# Altium PCB ECG_BLE.PcbDoc (part 1 of 3)
Units mm, origin at the board's own origin, x right, y up, seen from the top; angles counter-clockwise.
Board outline 50.01 x 55.29 mm, 4 copper layers (Top Layer, Internal Plane-GND, Internal Plane-PWR, Bottom Layer), stack 0.99 mm thick; 109 components, 65 nets, 326 pads, 171 vias.
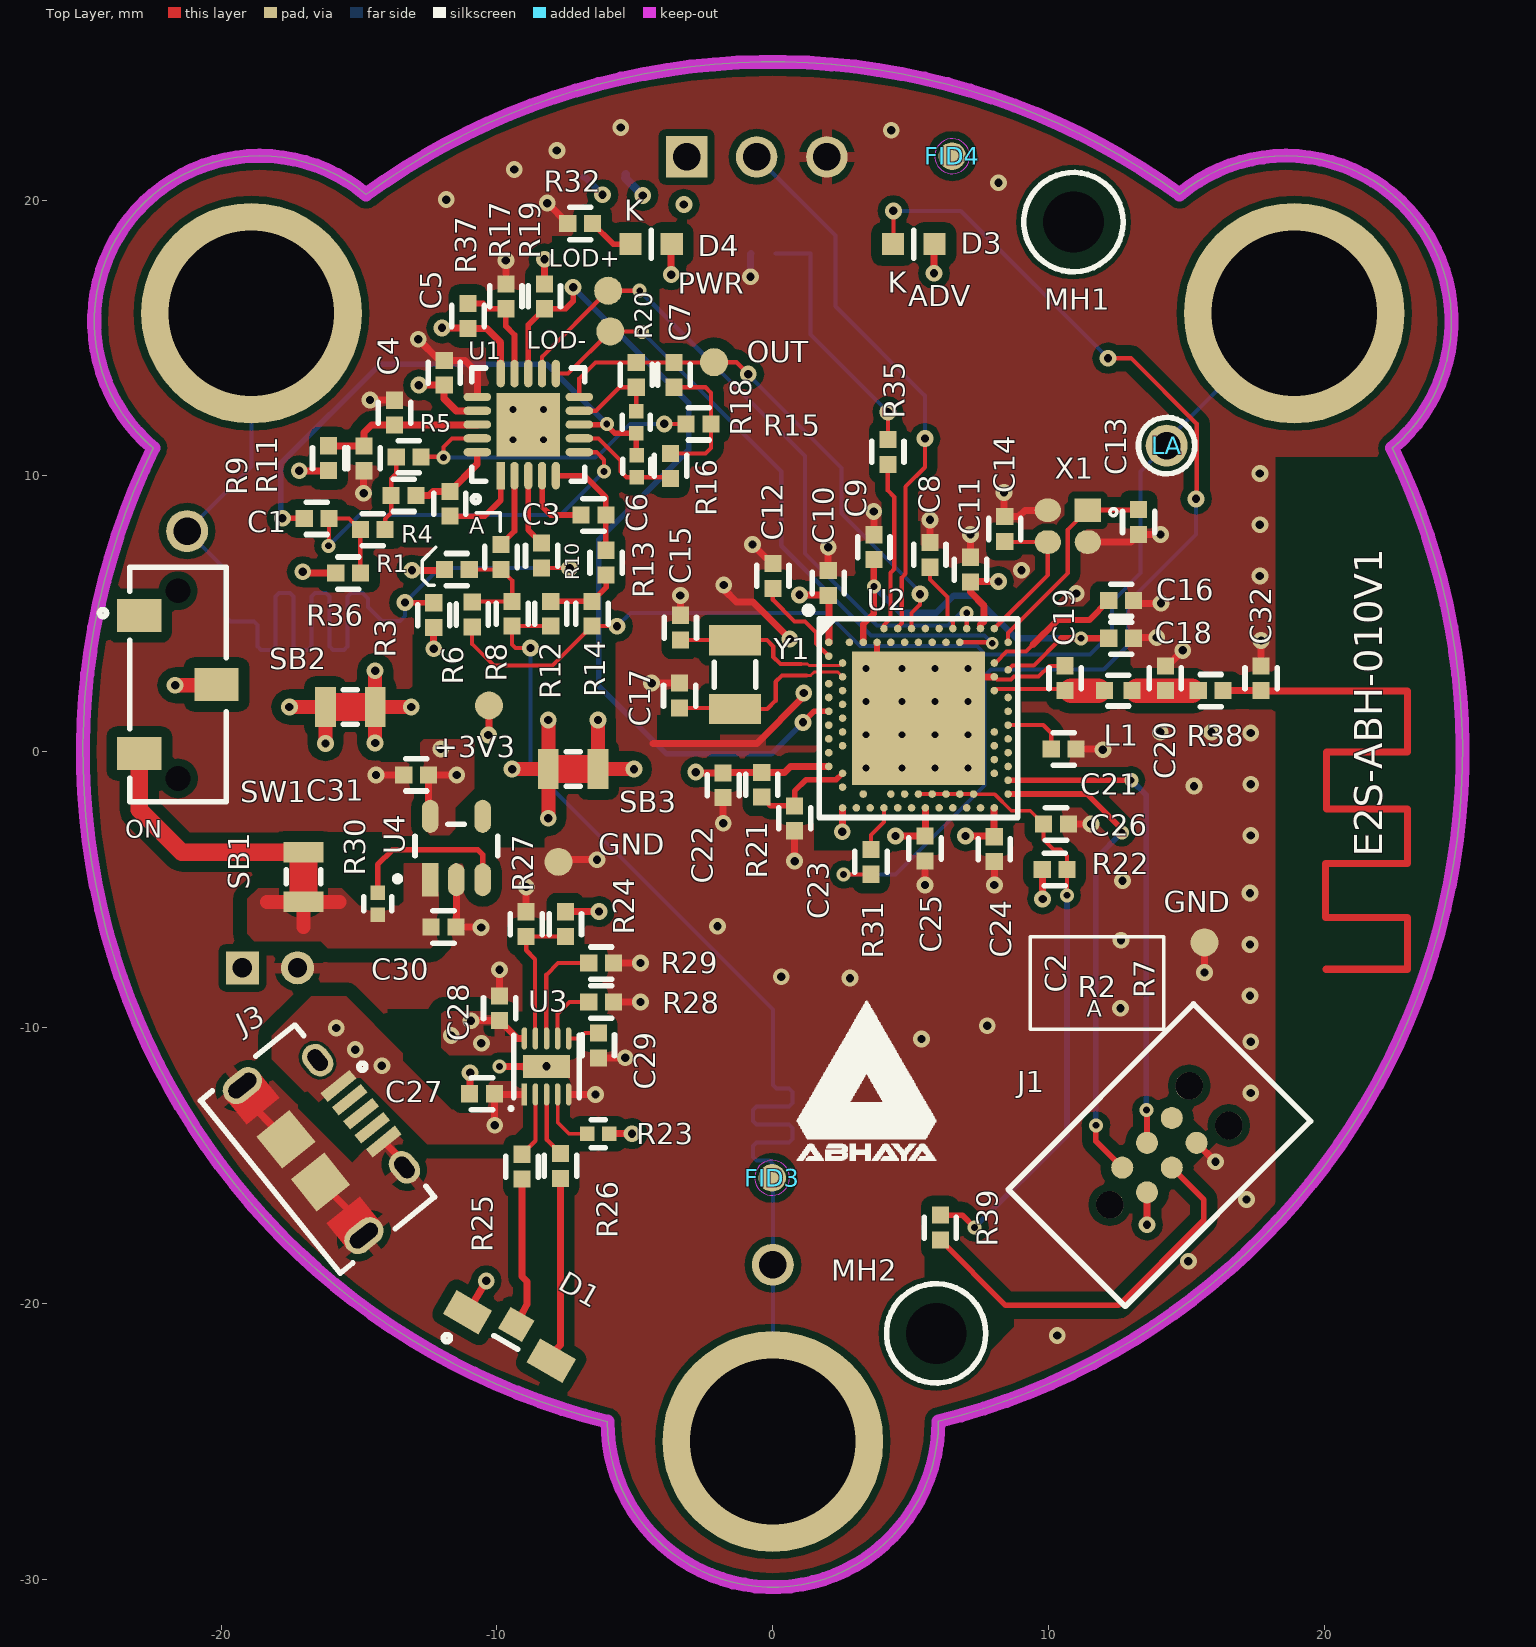
[diagram p0: Top Layer view]
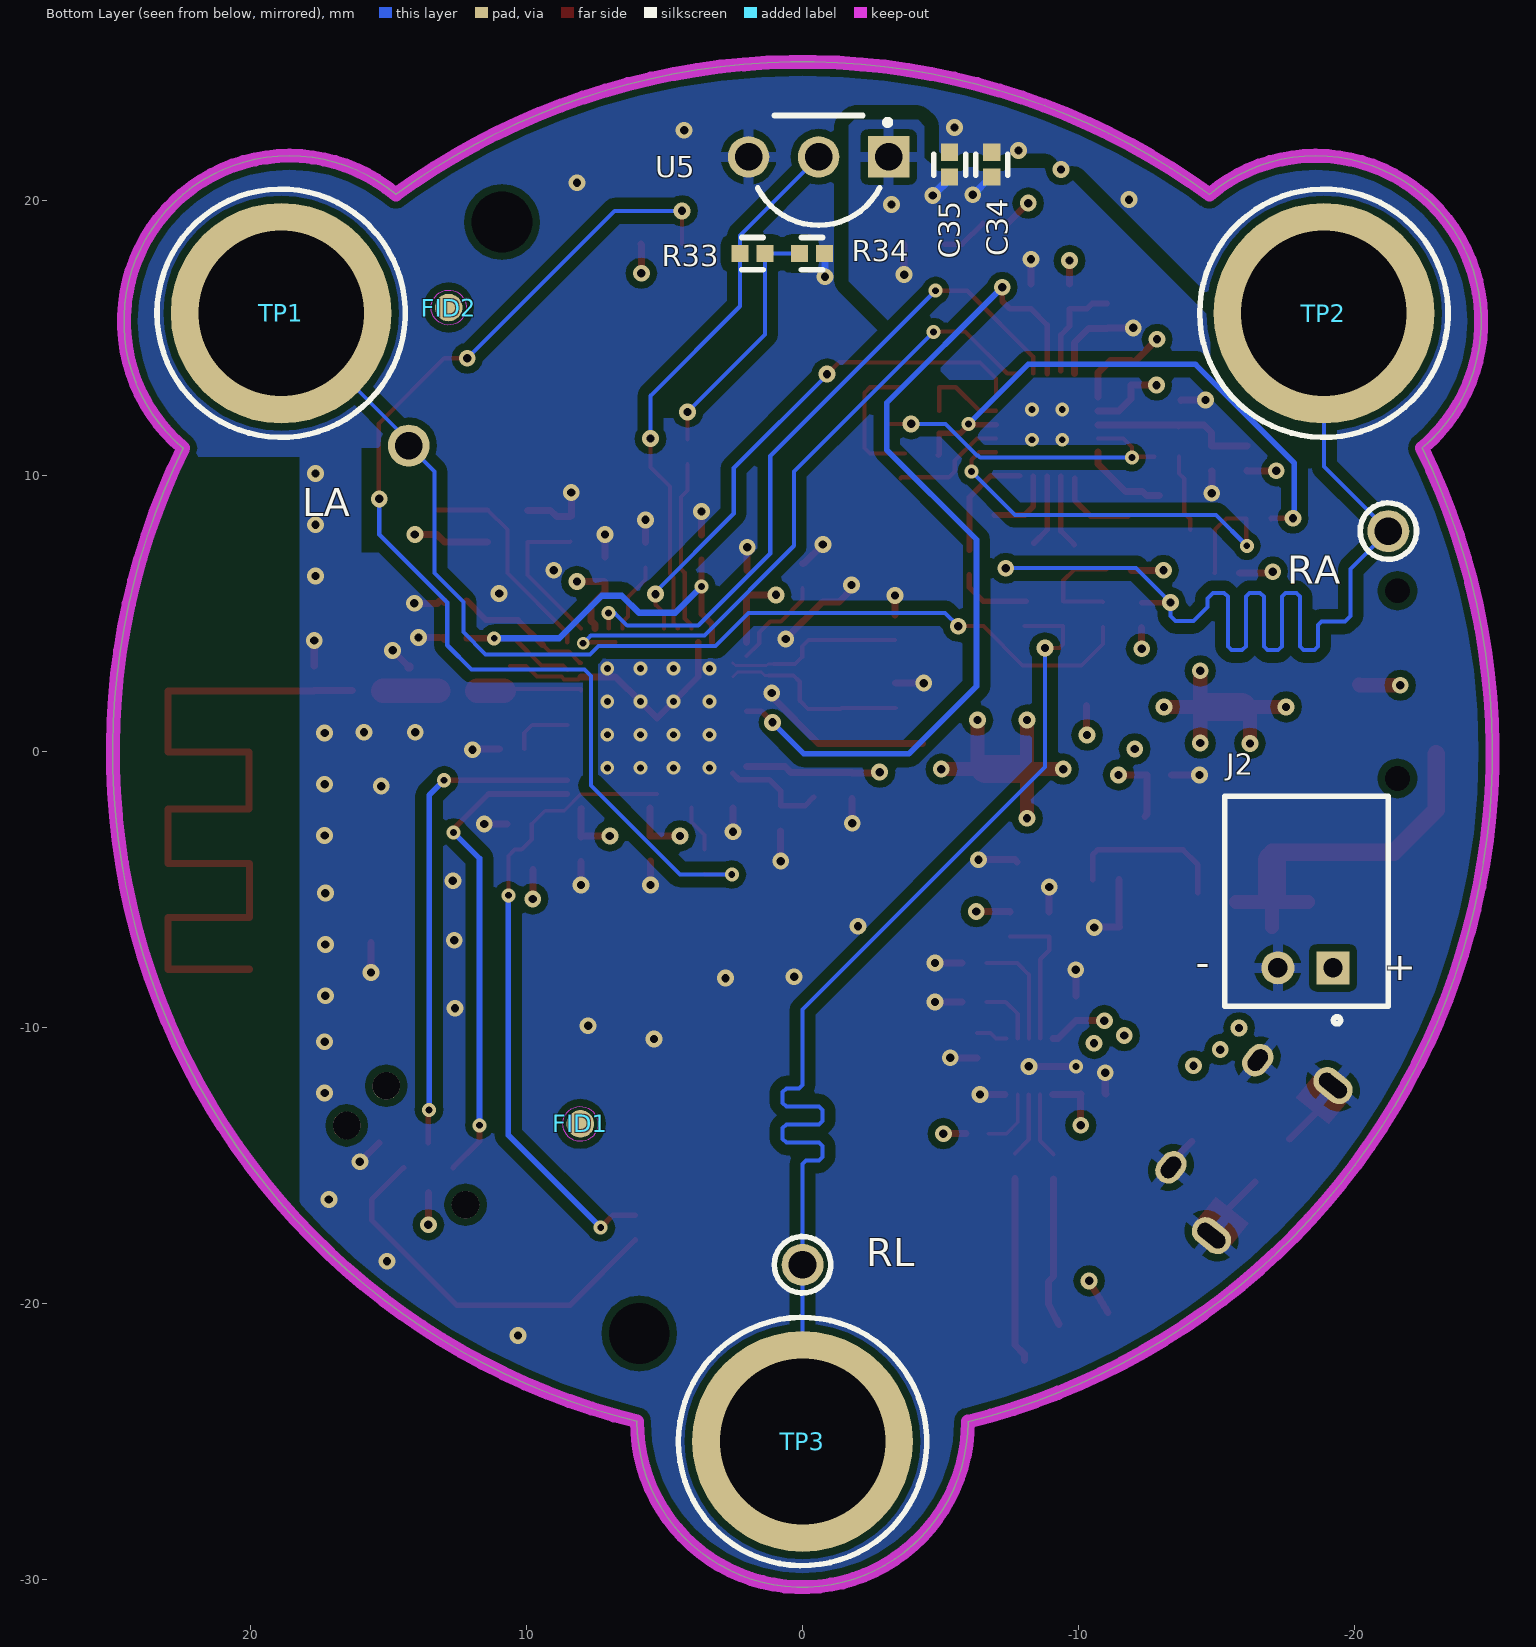
[diagram p1: Bottom Layer view, seen from below]
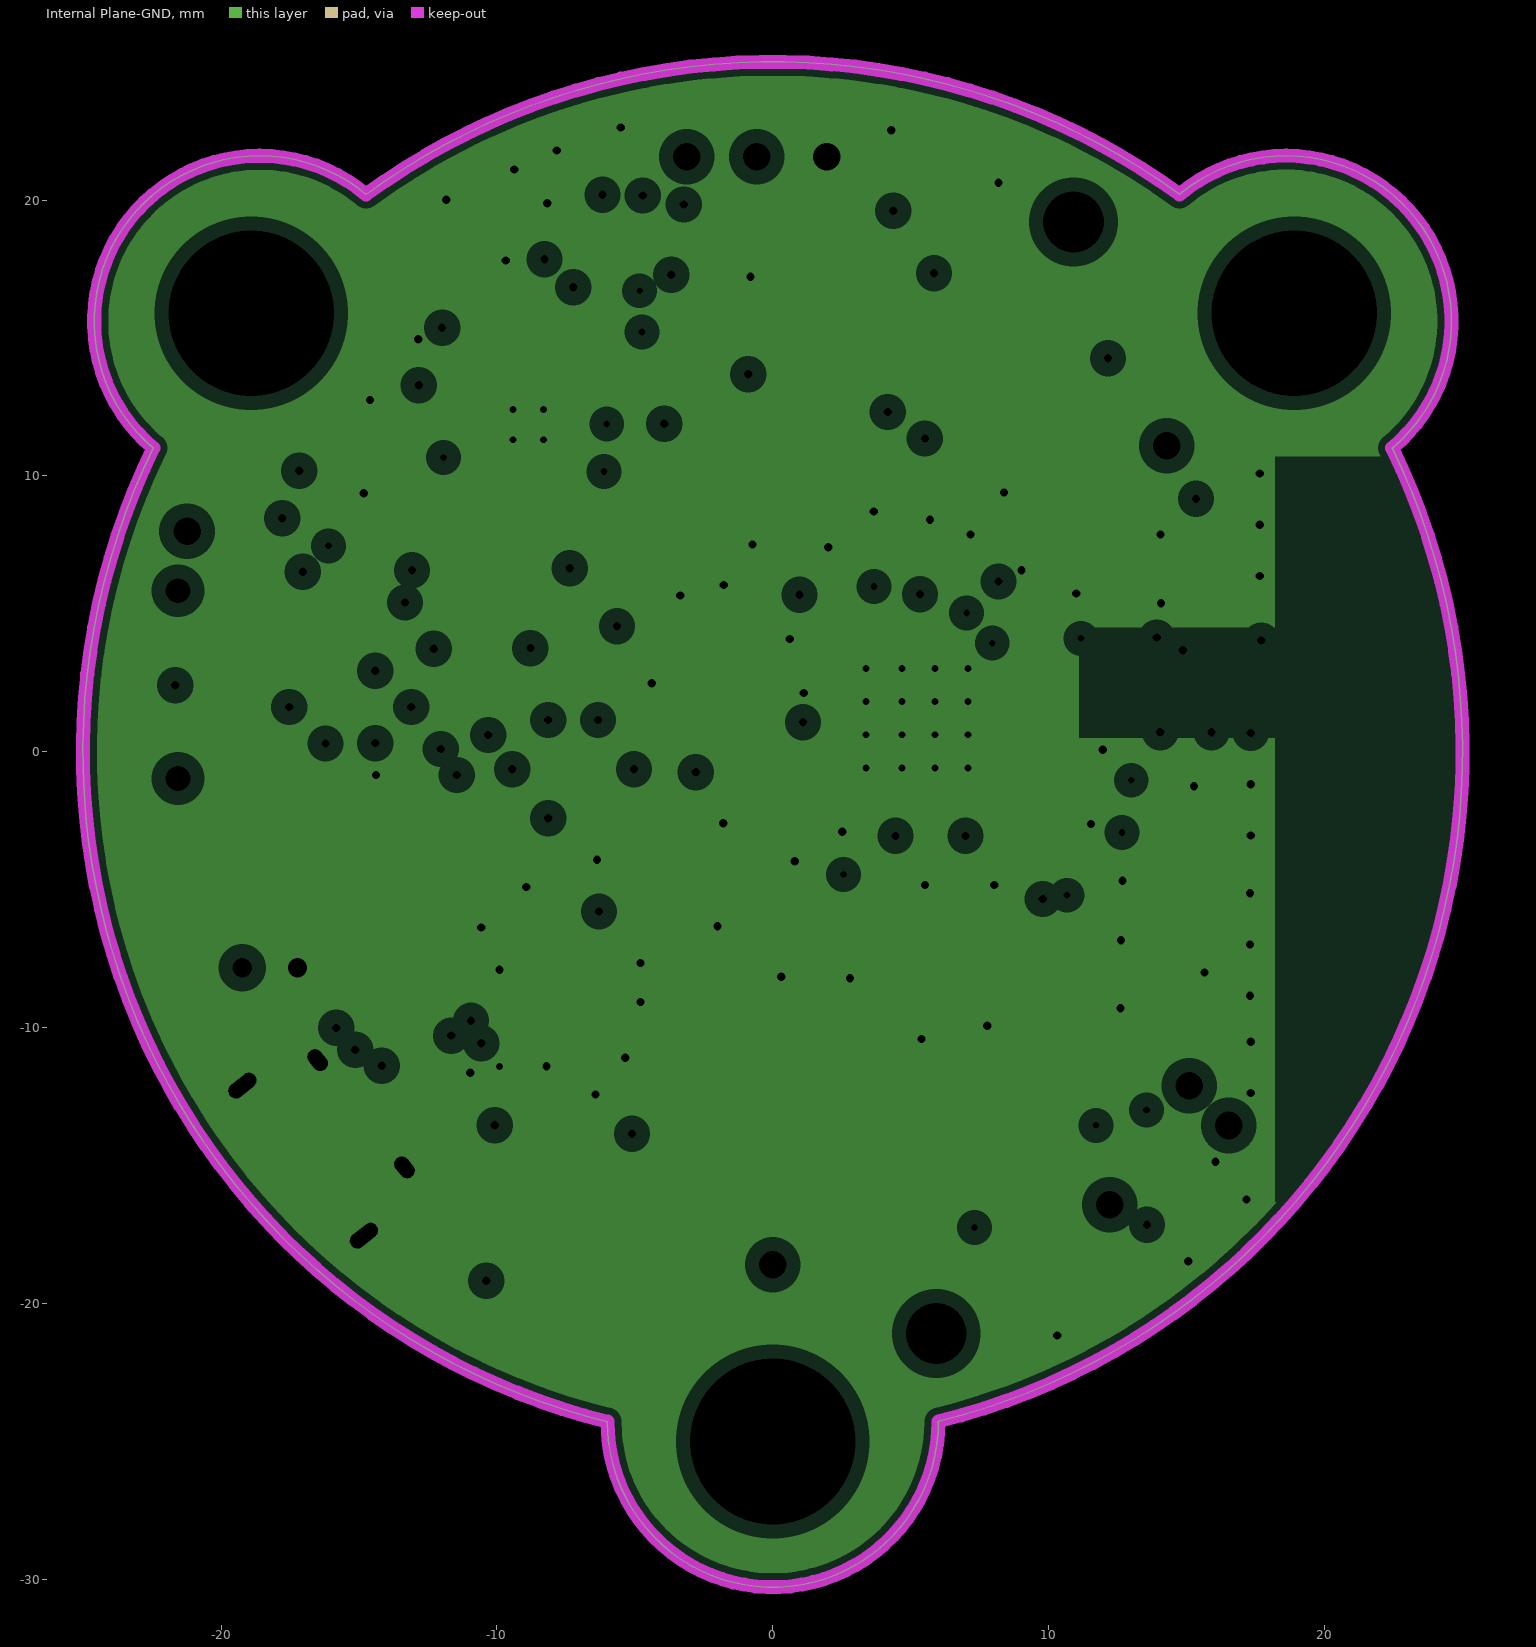
[diagram p2: Internal Plane-GND, clearances drawn from the general rule]
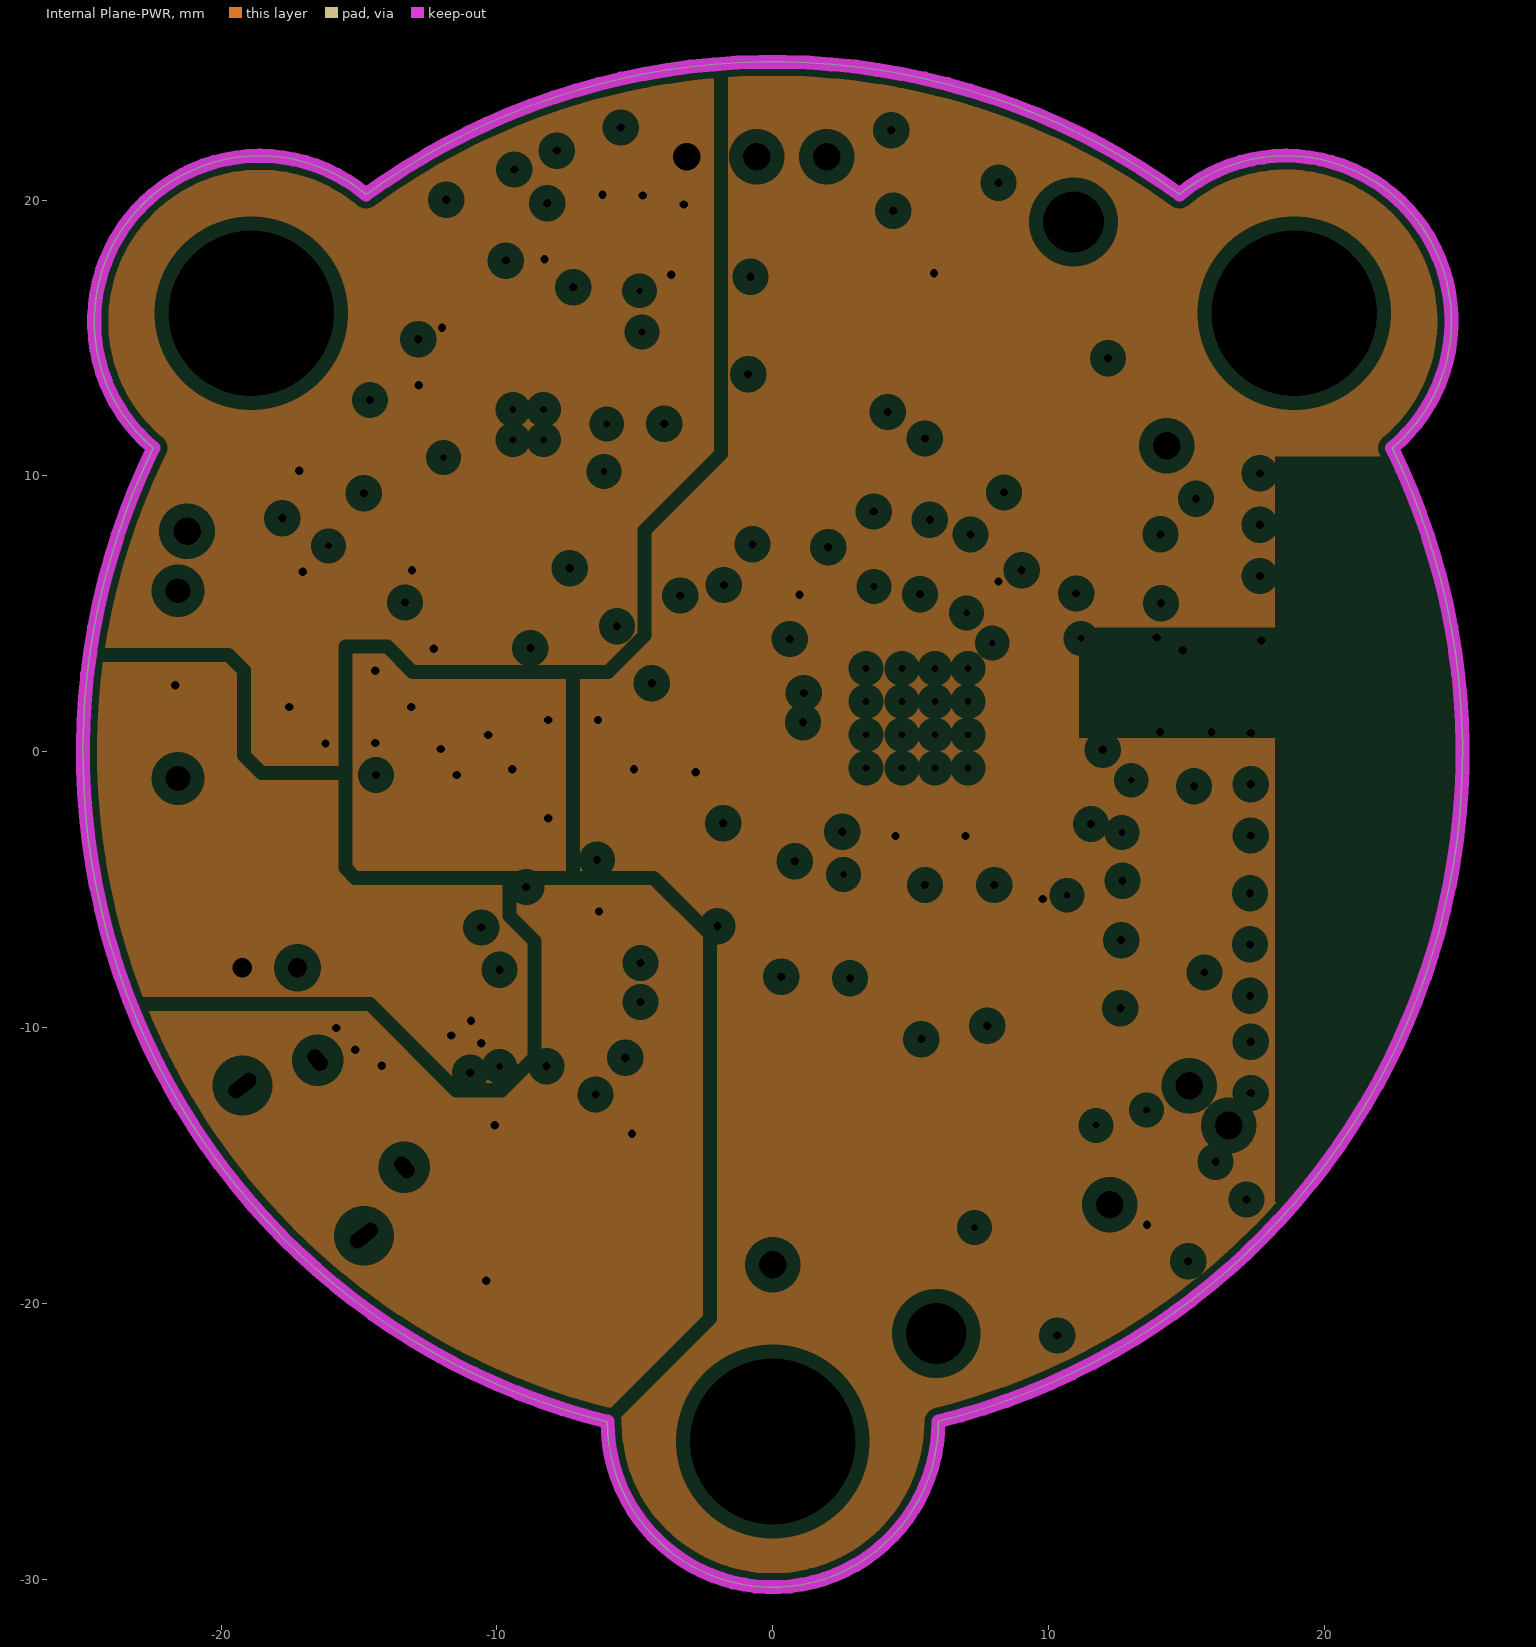
[diagram p3: Internal Plane-PWR, clearances drawn from the general rule]
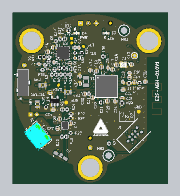
[diagram p5: 3D render of the assembled board from above, using the file's embedded part models]
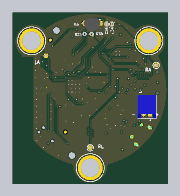
[diagram p6: 3D render of the assembled board from below, using the file's embedded part models]

## Layer stack, top to bottom
Top Solder: solder mask 0.01, Solder Resist, Dk 3.5
Top Layer: signal copper 0.035
Dielectric1: core 0.125, FR-4, Dk 4.2
Internal Plane-GND: plane copper 0.035, net +3V3
Dielectric 2: prepreg 0.6, Dk 4.2
Internal Plane-PWR: plane copper 0.035, net GND
Dielectric 3: core 0.125, Dk 4.2
Bottom Layer: signal copper 0.035
Bottom Solder: solder mask 0.01, Solder Resist, Dk 3.5

## Board outline
-5.998,-24.283 cw(c0.002,0) -22.457,11.011 -22.459,11.011 cw(c-18.602,15.606) -14.746,20.203 -14.745,20.205 cw(c0,0) 14.743,20.206 cw(c18.599,15.609) 22.45,11.008 cw(c0,0) 6,-24.273 6.002,-24.273 cw(c0.002,-24.281)

## Design rules (kind name [scope] priority, off if disabled: settings)
AcuteAngle [All] p1: minimum=6.00000000000000E+0001 checktracksonly=TRUE
Clearance NRF-IC [WithinRoom('Tiny_Pad')] p1: gap=0.102 ignorepadtopadclearanceinfootprint=FALSE except(0.508: Poly-Poly)
Clearance NetR26_1 [InNet('NetR26_1') vs InNet('NetR23_2')] p2: gap=0.254 ignorepadtopadclearanceinfootprint=FALSE except(0.178: Track-SMDPad SMDPad-SMDPad; 0.229: Track-Track; 0.381: Track-Poly SMDPad-Poly; 0.508: Poly-Poly)
Clearance LDO- [InNet('LOD-') vs InNet('NetC14_2')] p3: gap=0.254 ignorepadtopadclearanceinfootprint=FALSE except(0.152: SMDPad-Via; 0.226: Track-SMDPad Track-Via; 0.381: Track-Poly SMDPad-Poly; 0.508: Poly-Poly)
Clearance nRF_RESET [InNet('nRF_RESET') vs InNet('VDD_nRF')] p4: gap=0.254 ignorepadtopadclearanceinfootprint=FALSE except(0.127: Track-Track Track-SMDPad; 0.381: Track-Poly SMDPad-Poly; 0.508: Poly-Poly)
Clearance SWDIO [InNet('SWDIO') vs InNet('nRF_RESET')] p5: gap=0.254 ignorepadtopadclearanceinfootprint=FALSE except(0.102: Track-SMDPad; 0.127: Track-Track; 0.381: Track-Poly SMDPad-Poly; 0.508: Poly-Poly)
Clearance Temp [InNet('TEMP_CENTIGRADE_OUT') vs InNet('SIGNAL_OUT')] p6: gap=0.254 ignorepadtopadclearanceinfootprint=FALSE except(0.152: Track-SMDPad SMDPad-SMDPad; 0.178: Track-Track; 0.381: Track-Poly SMDPad-Poly; 0.508: Poly-Poly)
Clearance Heart-Rate-Monitor [HasFootprint('QFN50P400X400X80_HS-21N')] p7: gap=0.254 ignorepadtopadclearanceinfootprint=FALSE except(0.178: Arc-Track Track-Track Track-SMDPad SMDPad-SMDPad; 0.508: Poly-Poly)
Clearance ANTENNA [InNetClass('RF-ANTENNA') vs InNet('GND')] p8: gap=0.254 ignorepadtopadclearanceinfootprint=FALSE except(0.137: Track-SMDPad; 0.381: Track-Poly SMDPad-Poly; 0.508: Poly-Poly)
Clearance POWER [HasFootprint('SON40P220X220x80_HS-11N')] p9: gap=0.254 ignorepadtopadclearanceinfootprint=FALSE except(0.152: Track-Track; 0.178: Track-SMDPad SMDPad-SMDPad; 0.381: Track-Poly SMDPad-Poly; 0.508: Poly-Poly)
Clearance XTAL [HasFootprint('XTAL200X160X50-4N')] p10: gap=0.254 ignorepadtopadclearanceinfootprint=FALSE except(0.102: Arc-Track Arc-SMDPad Track-Track Track-SMDPad SMDPad-SMDPad; 0.508: Poly-Poly)
Clearance HRM [HasFootprint('QFN50P400X400X80-21N')] p11: gap=0.254 ignorepadtopadclearanceinfootprint=FALSE except(0.229: Arc-SMDPad Track-SMDPad SMDPad-SMDPad; 0.508: Poly-Poly)
Clearance USB [HasFootprint('USB_MICRO_B_10118194-0001LF')] p12: gap=0.102 ignorepadtopadclearanceinfootprint=FALSE
Clearance KEEPOUT-CL [OnLayer('Keep-Out Layer')] p13: gap=0.254 ignorepadtopadclearanceinfootprint=FALSE except(0.508: Poly-Poly)
Clearance [All] p14: gap=0.254 ignorepadtopadclearanceinfootprint=FALSE except(0.381: Track-Poly SMDPad-Poly; 0.508: Poly-Poly)
HoleSize [All] p1: absolutevalues=TRUE maxlimit=6.096 minlimit=0.025 maxpercent=80.000 minpercent=20.000
Length [InNetClass('Electrodes')] p1: maxlimit=41.148 minlimit=41.097
MatchedLengths [InNetClass('Electrodes')] p1: tolerance=0.127 checknetsindiffpair=FALSE checkdiffpairvsdiffpair=TRUE checkxsignals=TRUE checkothers=TRUE
MinimumSolderMaskSliver [All] p1: minsoldermaskwidth=0.076
PlaneClearance [All] p1: clearance=0.508
PlaneConnect [All] p1: pad.planeconnectstyle=Relief pad.reliefexpansion=0.508 pad.reliefentries=4 pad.reliefconductorwidth=0.381 pad.reliefairgap=0.254 via.planeconnectstyle=Direct via.reliefexpansion=0.381 via.reliefentries=4 via.reliefconductorwidth=0.381 via.reliefairgap=0.254
PolygonConnect VBAT [IsNamedPolygon('TOP_LAYER-VBAT')] p1: thpad.connectstyle=Relief thpad.reliefconductorwidth=0.381 thpad.reliefentries=4 thpad.polygonreliefangle="90 Angle" thpad.airgapwidth=0.254 smdpad.connectstyle=Relief smdpad.reliefconductorwidth=0.381 smdpad.reliefentries=4 smdpad.polygonreliefangle="90 Angle" smdpad.airgapwidth=0.254 via.connectstyle=Direct via.reliefconductorwidth=0.254 via.reliefentries=4 via.polygonreliefangle="90 Angle" via.airgapwidth=0.254
PolygonConnect VDD_nRF [IsNamedPolygon('TOP_LAYER-VDD_nRF')] p2: thpad.connectstyle=Direct thpad.reliefconductorwidth=0.254 thpad.reliefentries=4 thpad.polygonreliefangle="90 Angle" thpad.airgapwidth=0.254 smdpad.connectstyle=Relief smdpad.reliefconductorwidth=0.381 smdpad.reliefentries=4 smdpad.polygonreliefangle="90 Angle" smdpad.airgapwidth=0.254 via.connectstyle=Relief via.reliefconductorwidth=0.254 via.reliefentries=4 via.polygonreliefangle="90 Angle" via.airgapwidth=0.254
PolygonConnect VCC_3v3 [IsNamedPolygon('TOP_LAYER-VCC_3V3')] p3: thpad.connectstyle=Relief thpad.reliefconductorwidth=0.381 thpad.reliefentries=4 thpad.polygonreliefangle="90 Angle" thpad.airgapwidth=0.254 smdpad.connectstyle=Relief smdpad.reliefconductorwidth=0.381 smdpad.reliefentries=4 smdpad.polygonreliefangle="90 Angle" smdpad.airgapwidth=0.254 via.connectstyle=Direct via.reliefconductorwidth=0.254 via.reliefentries=4 via.polygonreliefangle="90 Angle" via.airgapwidth=0.254
PolygonConnect [All] p4: thpad.connectstyle=Relief thpad.reliefconductorwidth=0.381 thpad.reliefentries=4 thpad.polygonreliefangle="90 Angle" thpad.airgapwidth=0.254 smdpad.connectstyle=Direct smdpad.reliefconductorwidth=0.381 smdpad.reliefentries=4 smdpad.polygonreliefangle="90 Angle" smdpad.airgapwidth=0.254 via.connectstyle=Direct via.reliefconductorwidth=0.381 via.reliefentries=4 via.polygonreliefangle="90 Angle" via.airgapwidth=0.254
RoomDefinition Tiny_Pad [All] p1 off: confinementstyle=ConfineOut formatcopy=TRUE lockcomponents=FALSE outline 1.041,4.775 9.243,4.775 9.243,-2.517 1.041,-2.517
RoutingVias [All] p1: holewidth=0.254 width=0.508 viastyle="Through Hole" minholewidth=0.203 minwidth=0.457 maxholewidth=0.305 maxwidth=0.61
SilkToSilkClearance [All] p1: silktosilkclearance=0.127
SilkToSolderMaskClearance [IsPad] p1: minsilkscreentomaskgap=0.104 clearancetoexposedcopper=TRUE
SolderMaskExpansion [All] p1: expansion=0.102
Width EL [InNetClass('Electrodes')] p1: maxlimit=0.203 minlimit=0.145 preferedwidth=0.145
Width RF-SIGNALS [InNetClass('RF-ANTENNA')] p2: maxlimit=1.27 minlimit=0.145 preferedwidth=0.145
Width [All] p3: maxlimit=1.27 minlimit=0.102 preferedwidth=0.152
24 further rules are at their usual default settings.

## Classes and differential pairs
net class Electrodes: LA RA RL
net class Clearance-6mil: LOD- NetC14_2 nRF_RESET SWDIO
net class RF-ANTENNA: ANT NetC19_2 RF
component class "AD8232 & TMP136": C1 C2 C3 C4 C5 C6 C7 C34 C35 LA LOD+ LOD- OUT R1 R2 R3 R4 R5 R6 R7 R8 R9 R10 R11 R12 R13 R14 R15 R16 R17 R18 R19 R20 R33 R34 R36 R37 RA RL SB2 TP1 TP2 TP3 U1 U5
component class nRF52840: C8 C9 C10 C11 C12 C13 C14 C15 C16 C17 C18 C19 C20 C21 C22 C23 C24 C25 C26 C32 D3 D4 J1 L1 R21 R22 R31 R32 R35 R38 R39 SB3 U2 X1 Y1
component class "USB & Battery Charging": +3V3 C27 C28 C29 C30 C31 D1 FID1 FID2 FID3 FID4 GND J2 J3 MH1 MH2 R23 R24 R25 R26 R27 R28 R29 R30 SB1 SW1 U3 U4

## Components (designator, comment, footprint, x,y, rotation, side; value= is the part's Value field where it differs from the comment)
+3V3 "TEST POINT" TP_40X40 -10.287,1.676 r270 top
C1 "CAP CER 0.33UF 10V X5R 0402" SMDC0402 -16.535,8.462 r180 top value=0.33µF
C2 "CAP CER 0.33UF 10V X5R 0402" SMDC0402 -11.709,8.992 r90 top value=0.33µF
C3 "CAP CER 1000PF 50V X7R 0402" SMDC0402 -6.502,8.585 r180 top value=1000pF
C4 "CAP CER 0.1UF 16V X7R 0402" SMDC0402 -13.716,12.294 r270 top value=0.10µF
C5 "CAP CER 0.1UF 16V X7R 0402" SMDC0402 -11.913,13.741 r270 top value=0.10µF
C6 "CAP CER 10000PF 50V X7R 0402" SMDCC0402 -4.928,10.351 r270 top value=10000pF
C7 "CAP CER 1500PF 50V X7R 0402" SMDC0402 -3.581,13.665 r270 top value=1500pF
C8 "CAP CER 100PF 25V X7RCAP CER 100PF 25V C0G/NP0 0402 0402" SMDC0402 5.694,7.139 r90 top value=DNP
C9 "CAP CER 1UF 16V X5R 0402" SMDC0402 3.661,7.417 r270 top value=1µF
C10 "CAP CER 1UF 16V X5R 0402" SMDC0402 2.007,6.121 r270 top value=1µF
C11 "CAP CER 0.1UF 16V X7R 0402" SMDC0402 7.163,6.604 r270 top value=0.10µF
C12 "CAP CER 0.1UF 16V X7R 0402" SMDC0402 0,6.375 r270 top value=0.10µF
C13 "CAP CER 12PF 50V C0G/NP0 0402" SMDC0402 13.259,8.331 r90 top value=12pF
C14 "CAP CER 12PF 50V C0G/NP0 0402" SMDC0402 8.407,8.077 r270 top value=12pF
C15 "CAP CER 12PF 50V C0G/NP0 0402" SMDC0402 -3.353,4.501 r270 top value=12pF
C16 "CAP CER 100PF 25V X7RCAP CER 100PF 25V C0G/NP0 0402 0402" SMDC0402 12.628,5.488 r0 top value=100PF
C17 "CAP CER 12PF 50V C0G/NP0 0402" SMDC0402 -3.378,2.037 r270 top value=12pF
C18 "CAP CER 100PF 25V X7RCAP CER 100PF 25V C0G/NP0 0402 0402" SMDC0402 12.628,4.116 r0 top value=DNP
C19 "CAP CER 1PF 50V C0G/NP0 0402" SMDC0402 10.596,2.668 r270 top value=1pF
C20 "CAP CER 1PF 50V C0G/NP0 0402" SMDC0402 14.227,2.667 r270 top value=1pF
C21 "CAP CER 820PF 50V C0G/NP0 0402" SMDC0402 10.541,0.102 r180 top value=820pF
C22 "CAP CER 4.7UF 6.3V X5R 0402" SMDC0402 -1.8,-1.212 r90 top value=4.7µF
C23 "CAP CER 4.7UF 6.3V X5R 0402" SMDC0402 0.791,-2.412 r90 top value=4.7µF
C24 "CAP CER 0.1UF 16V X7R 0402" SMDC0402 8.025,-3.529 r90 top value=0.10µF
C25 "CAP CER 0.1UF 16V X7R 0402" SMDC0402 5.516,-3.504 r90 top value=0.10µF
C26 "CAP CER 4.7UF 6.3V X5R 0402" SMDC0402 10.266,-2.615 r180 top value=4.7µF
C27 "CAP CER 10UF 10V X5R 0402" SMDC0402 -10.541,-12.395 r180 top value=10µF
C28 "CAP CER 10UF 10V X5R 0402" SMDC0402 -9.906,-9.296 r90 top value=10µF
C29 "CAP CER 0.1UF 16V X7R 0402" SMDC0402 -6.325,-10.643 r90 top value=0.10µF
C30 "CAP CER 1UF 16V X5R 0402" SMDC0402 -11.938,-6.352 r180 top value=1µF
C31 "CAP CER 1UF 16V X5R 0402" SMDC0402 -12.929,-0.838 r0 top value=1µF
C32 "CAP CER 1.5PF 50V NP0 0402" SMDC0402 17.7,2.667 r270 top value=1.5pF
C34 "CAP CER 2.2UF 10V JB 0402" SMDC0402 -6.858,21.285 r270 bottom value=DNP
C35 "CAP CER 0.1UF 16V X7R 0402" SMDC0402 -5.334,21.285 r270 bottom value=0.10µF
D1 "LED GREEN/RED CLEAR 1204 SMD R/A" LED-SM1204BC -9.677,-21.412 r240 top locked value=SM1204BC
D3 "LED BLUE CLEAR 2SMD" SMDLED0603 5.105,18.401 r180 top value=APT1608LVBC/D
D4 "LED GREEN CLEAR SMD" SMDLED0603 -4.415,18.401 r180 top value=LTST-C191KGKT
FID1 "FID40X40" FID40X40 8.052,-13.487 r270 bottom
FID2 "FID40X40" FID40X40 12.827,16.104 r270 bottom
FID3 "FID40X40" FID40X40 -0.025,-15.443 r270 top
FID4 "FID40X40" FID40X40 6.502,21.59 r270 top
GND "TEST POINT" TP_40X40 15.646,-6.909 r270 top (schematic designator GND1)
GND "TEST POINT" TP_40X40 -7.772,-3.988 r270 top
J1 "J-LINK 6-PIN NEEDLE ADAPTER" "PRG_8.06.16 J-LINK 6-PIN NEEDLE ADAPTER" 14.013,-14.622 r45 top value="8.06.16 J-LINK 6-PIN NEEDLE ADAPTER"
J2 "CONN HOUSING PH 2POS 2MM WHITE" SHDRRA2W70P0_200_1X2_590X790X550P -18.231,-7.83 r0 bottom locked value=S2B-PH-K-S(LF)(SN)
J3 "CONN USB MICRO B RECPT SMT R/A" USB_MICRO_B_10118194-0001LF -15.977,-13.97 r309 top locked value=10118194-0001LF
L1 "FIXED IND 3.9NH 170MA 500 MOHM" SMDL0402 12.525,2.218 r0 top value=3.9nH
LA "Test Point- 1.02mm Hole, 1.52mm Round Pad" TP_1.02X1.52MM_TH 14.275,11.1 r180 top
LOD+ "TEST POINT" TP_40X40 -5.969,16.713 r270 top
LOD- "TEST POINT" TP_40X40 -5.893,15.24 r270 top
MH1 "Mounting hole" MH_2P2MM_3P6KP 10.897,19.202 r180 top (schematic designator MH3)
MH2 "Mounting hole" MH_2P2MM_3P6KP 5.918,-21.082 r180 top
OUT "TEST POINT" TP_40X40 -2.134,14.122 r270 top
R1 "RES 1.4M OHM 1% 1/16W 0402" SMDR0402 -14.503,8.052 r180 top value="1.4 MOhms"
R2 "RES SMD 10M OHM 5% 1/10W 0402" SMDR0402 -11.455,6.604 r180 top value="10 M"
R3 "RES SMD 10M OHM 5% 1/10W 0402" SMDR0402 -12.294,4.953 r270 top value="10 M"
R4 "RES SMD 10M OHM 5% 1/10W 0402" SMDR0402 -13.386,9.296 r0 top value="10 M"
R5 "RES SMD 10M OHM 5% 1/10W 0402" SMDR0402 -13.201,10.693 r0 top value="10 M"
R6 "RES SMD 0.0OHM JUMPER 1/10W 0402" SMDR0402 -10.897,4.978 r90 top value=0R
R7 "RES SMD 180K OHM 1% 1/16W 0402" SMDR0402 -9.855,7.061 r90 top value="180 kOhms"
R8 "RES SMD 0.0OHM JUMPER 1/10W 0402" SMDR0402 -9.449,5.004 r90 top value=DNP
R9 "RES SMD 10M OHM 5% 1/10W 0402" SMDR0402 -16.104,10.643 r270 top value="10 M"
R10 "RES SMD 180K OHM 1% 1/16W 0402" SMDR0402 -8.382,7.112 r90 top value="180 kOhms"
R11 "RES SMD 10M OHM 5% 1/10W 0402" SMDR0402 -14.821,10.638 r90 top value="10 M"
R12 "RES SMD 0.0OHM JUMPER 1/10W 0402" SMDR0402 -8.052,5.004 r90 top value=0R
R13 "RES SMD 360K OHM 1% 1/10W 0402" SMDR0402 -6.045,6.858 r90 top value="360 kOhms"
R14 "RES SMD 0.0OHM JUMPER 1/10W 0402" SMDR0402 -6.553,5.004 r90 top value=DNP
R15 "RES SMD 1M OHM 1% 1/10W 0402" SMDR0402 -2.692,11.887 r180 top value=1M
R16 "RES SMD 1M OHM 1% 1/10W 0402" SMDR0402 -3.708,10.363 r90 top value=1M
R17 "RES SMD 0.0OHM JUMPER 1/10W 0402" SMDR0402 -9.677,16.51 r90 top value=0R
R18 "RES SMD 100K OHM 1% 1/10W 0402" SMDRC0402 -4.953,11.951 r90 top value=100K
R19 "RES SMD 10K OHM 1% 1/10W 0402" SMDR0402 -8.28,16.51 r270 top value=10K
R20 "RES SMD 1M OHM 1% 1/10W 0402" SMDR0402 -4.953,13.665 r90 top value=1M
R21 "RES SMD 0.0OHM JUMPER 1/10W 0402" SMDR0402 -0.403,-1.194 r270 top value=0R
R22 "RES SMD 4.7K OHM 5% 1/10W 0402" SMDR0402 10.214,-4.267 r180 top value=4.7K
R23 "RES SMD 100K OHM 1% 1/10W 0402" SMDRC0402 -6.325,-13.843 r180 top value=100K
R24 "RES SMD 10K OHM 1% 1/10W 0402" SMDR0402 -7.518,-6.248 r270 top value=10K
R25 "RES SMD 1.5K OHM 1% 1/10W 0402" SMDR0402 -9.093,-15.037 r270 top value=1.5K
R26 "RES SMD 1.5K OHM 1% 1/10W 0402" SMDR0402 -7.696,-15.011 r270 top value=1.5K
R27 "RES SMD 10K OHM 1% 1/10W 0402" SMDR0402 -8.941,-6.248 r90 top value=10K
R28 "RES SMD 16.5K OHM 1% 1/10W 0402" SMDR0402 -6.223,-9.068 r180 top value=16.5K
R29 "RES SMD 13.3K OHM 1% 1/10W 0402" SMDR0402 -6.223,-7.658 r0 top value=13.3K
R30 "RES SMD 100K OHM 1% 1/10W 0402" SMDRC0402 -14.326,-5.512 r270 top value=100K
R31 "RES SMD 470 OHM 1% 1/10W 0402" SMDR0402 3.556,-3.988 r270 top value=470R
R32 "RES SMD 1K OHM 1% 1/10W 0402" SMDR0402 -6.985,19.152 r180 top value=1K
R33 "RES 45.3K OHM 0.5% 1/16W 0402" SMDR0402 1.816,18.059 r0 bottom value=DNP
R34 "RES SMD 10K OHM 0.5% 1/16W 0402" SMDR0402 -0.343,18.059 r0 bottom value=DNP
R35 "RES SMD 0.0OHM JUMPER 1/10W 0402" SMDR0402 4.169,10.871 r90 top value=DNP
R36 "RES SMD 0.0OHM JUMPER 1/10W 0402" SMDR0402 -15.392,6.477 r180 top value=DNP
R37 "RES SMD 0.0OHM JUMPER 1/10W 0402" SMDR0402 -11.049,15.799 r90 top value=DNP
R38 "RES SMD 0.0OHM JUMPER 1/10W 0402" SMDR0402 15.871,2.217 r0 top value=0R
R39 "RES SMD 0.0OHM JUMPER 1/10W 0402" SMDR0402 6.071,-17.247 r270 top value=DNP
RA "Test Point- 1.02mm Hole, 1.52mm Round Pad" TP_1.02X1.52MM_TH -21.234,8.001 r0 bottom
RL "Test Point- 1.02mm Hole, 1.52mm Round Pad" TP_1.02X1.52MM_TH 0,-18.593 r0 bottom
SB1 "EMS_SB0805" SB_0805 -17.018,-4.536 r270 top net-tie
SB2 "EMS_SB0805" SB_0805 -15.316,1.626 r180 top net-tie
SB3 "EMS_SB0805" SB_0805 -7.24,-0.627 r0 top net-tie
SW1 "SWITCH SLIDE SPDT 200MA 12V" SWITCH_CLSB12A11T -21.565,2.438 r270 top locked value=CL-SB-12A-11T
TP1 "Electrode point" ELE-MH-6X8MM 18.9,15.9 r0 bottom
TP2 "Electrode point" ELE-MH-6X8MM -18.9,15.9 r0 bottom
TP3 "Electrode point" ELE-MH-6X8MM 0,-25 r0 bottom
U1 "Analog Front End - AFE ECG and HRM IC Single Lead" QFN50P400X400X80_HS-21N -8.865,11.862 r90 top value=AD8232ACPZ-R7
U2 "IC RF TXRX+MCU 802.15.4 73VFQFN" AQFN50P700X700X85_HS-74N 5.277,1.219 r0 top value=NRF52840-QIAA-R
U3 "1.6A LINEAR LI-ION CHGR 10TDFN" SON40P220X220x80_HS-11N -8.204,-11.405 r90 top value=AAT3693IDH-AA-T1
U4 "IC REG LINEAR 3.3V 150MA SOT23-5" SOT95P350X145-5N -11.471,-3.487 r0 top value=MCP1711T-33I/OT
U5 "SENSOR ANALOG -40C-125C TO92-3" TO-226-AA -0.584,21.565 r0 bottom value=TMP36GT9Z
X1 "CRYSTAL 32.0000MHZ 8PF SMD" XTAL200X160X50-4N 10.693,8.179 r180 top value=ECS-320-8-37CKM
Y1 "CRYSTAL 32.7680KHZ 12.5PF SMD" XTAL325X155X80N -1.372,2.799 r270 top value=ABS07-32.768KHZ-T

## Footprints (in the part's own frame and the unit in brackets; to place one, negate y for a bottom-side part, rotate by r counter-clockwise, add the part's x,y. Pads: shape width x height; smd on the part's side, far side on the other; paste and mask are expansions set on the pad)
AQFN50P700X700X85_HS-74N [mm]
  rect 4.83x4.83 smd paste-5 mask+0.05: 74(0,0)
  round 0.275 smd mask+0.05: A8(-1.25,3.25) A10(-0.75,3.25) A12(-0.25,3.25) A14(0.25,3.25) A16(0.75,3.25) A18(1.25,3.25) A20(1.75,3.25) A22(2.25,3.25) A23(2.75,3.25) AA24(3.25,-2.25) AB2(-2.75,-2.5) AC5(-2,-2.75) AC9(-1,-2.75) AC11(-0.5,-2.75) AC13(0,-2.75) AC15(0.5,-2.75) AC17(1,-2.75) AC19(1.5,-2.75) AC21(2,-2.75) AC24(3.25,-2.75) AD2(-2.75,-3.25) AD4(-2.25,-3.25) AD6(-1.75,-3.25) AD8(-1.25,-3.25) AD10(-0.75,-3.25) AD12(-0.25,-3.25) AD14(0.25,-3.25) AD16(0.75,-3.25) AD18(1.25,-3.25) AD20(1.75,-3.25) AD22(2.25,-3.25) AD23(2.75,-3.25) B1(-3.25,2.75) B3(-2.5,2.75) B5(-2,2.75) B7(-1.5,2.75) B9(-1,2.75) B11(-0.5,2.75) B13(0,2.75) B15(0.5,2.75) B17(1,2.75) B19(1.5,2.75) B24(3.25,2.75) C1(-3.25,2.25) D2(-2.75,2) D23(2.75,2) E24(3.25,1.75) F2(-2.75,1.5) F23(2.75,1.5) G1(-3.25,1.25) H2(-2.75,1) H23(2.75,1) J1(-3.25,0.75) J24(3.25,0.75) K2(-2.75,0.5) L1(-3.25,0.25) L24(3.25,0.25) M2(-2.75,0) N1(-3.25,-0.25) N24(3.25,-0.25) P2(-2.75,-0.5) P23(2.75,-0.5) R1(-3.25,-0.75) R24(3.25,-0.75) T2(-2.75,-1) T23(2.75,-1) U1(-3.25,-1.25) U24(3.25,-1.25) V23(2.75,-1.5) W1(-3.25,-1.75) W24(3.25,-1.75) Y2(-2.75,-2) Y23(2.75,-2)
  silkscreen extent -4.11,-3.6 3.6,4.04, body extent -3.5,-3.5 3.5,3.5, height 1
ELE-MH-6X8MM [mm]
  round 8 hole 6: 1(0,0)
  silkscreen extent -4.5,-4.5 4.5,4.5
FID40X40 [mm]
  round 1 smd paste-2 mask+0.254: 0(0,0)
  Top Layer keep-out circle w0.025: c0,0 r0.635
LED-SM1204BC [mm] "LED GREEN/RED CLEAR 1204 SMD R/A"
  rect 1x1.5 smd: 1(-0.25,-1.75) 3(-0.25,1.75)
  rect 0.9x1 smd: 2(-0.75,0)
  silkscreen extent 0,-2.06 1.06,0.5
MH_2P2MM_3P6KP [mm]
  round 0 hole 2.2 unplated: 1(0,0)
  Top Layer keep-out circle w0.025: c0,0 r1.8
  silkscreen extent -1.8,-1.8 1.8,1.8
"PRG_8.06.16 J-LINK 6-PIN NEEDLE ADAPTER" [mm]
  round 1 hole 1 unplated: 0(-2.54,0) 0(2.54,-1.016) 0(2.54,1.016)
  round 0.8 smd: 1(-1.27,-0.635) 2(-1.27,0.635) 3(0,-0.635) 4(0,0.635) 5(1.27,-0.635) 6(1.27,0.635)
  Top Layer pour cut-out: -1.778,-1.143 -1.778,1.143 1.778,1.143 1.778,-1.143
  silkscreen extent -4.75,-3 4.75,3
QFN50P400X400X80_HS-21N [mm] "QFN, 20-Leads, Body 4.00x4.00mm, Pitch 0.50mm, Thermal Pad 2.30x2.30mm, IPC Medium Density"
  rect 1x0.3 smd mask+0.051: 1(-1.85,1)
  oval 1x0.3 smd mask+0.051: 2(-1.85,0.5) 3(-1.85,0) 4(-1.85,-0.5) 5(-1.85,-1) 11(1.85,-1) 12(1.85,-0.5) 13(1.85,0) 14(1.85,0.5) 15(1.85,1)
  oval 0.3x1 smd mask+0.051: 6(-1,-1.85) 7(-0.5,-1.85) 8(0,-1.85) 9(0.5,-1.85) 10(1,-1.85) 16(1,1.85) 17(0.5,1.85) 18(0,1.85) 19(-0.5,1.85) 20(-1,1.85)
  rect 2.3x2.3 smd mask+0.051: 21(0,0)
  silkscreen extent -2.82,-2.05 2.05,2.05, body extent -2.1,-2.1 2.1,2.1, height 0.8
SB_0805 [mm]
  rect 0.75x1.45 smd mask+0.076: 1(-0.9,0) 2(0.9,0)
  Top Layer pour cut-out: -0.381,0.787 0.406,0.787 0.406,-0.762 0.381,-0.787 -0.381,-0.787
  Top Layer lines w1.016: 0.62,0 -0.62,0
  silkscreen extent -0.25,-0.63 0.25,0.63
SHDRRA2W70P0_200_1X2_590X790X550P [mm] "CONN HEADER PH SIDE 2POS 2MM"
  rect 1.2x1.2 hole 0.7 mask+0.076: 1(-1,0)
  round 1.2 hole 0.7 mask+0.076: 2(1,0)
  silkscreen extent -3,-6.22 2.92,2.03, body extent -2.95,-6.21 2.95,1.39, height 5
SMDC0402 [mm]
  rect 0.62x0.62 smd mask+0.076: 1(-0.45,0) 2(0.45,0)
  Top Layer pour cut-out: -0.102,0.406 0.102,0.406 0.102,-0.406 -0.102,-0.406
  silkscreen extent -0.38,-0.58 0.38,0.58, body extent -0.5,-0.25 0.5,0.25, height 0.51
SMDCC0402 [mm]
  rect 0.52x0.52 smd mask+0.076: 1(-0.4,0) 2(0.4,0)
  Top Layer pour cut-out: -0.102,0.254 0.076,0.254 0.076,-0.254 -0.102,-0.254
  silkscreen extent -0.25,-0.51 0.25,0.51, body extent -0.5,-0.25 0.5,0.25, height 0.5
SMDL0402 [mm]
  rect 0.62x0.62 smd mask+0.076: 1(-0.5,0) 2(0.5,0)
  silkscreen extent -0.38,-0.56 0.38,0.56, body extent -0.5,-0.24 0.5,0.26, height 0.3
SMDLED0603 [mm] "LED SMARTLED GREEN 570NM 0603, LG L29K-G2J1-24-Z"
  rect 0.8x0.8 smd mask+0.076: 1(-0.75,0) 2(0.75,0)
  Top Layer pour cut-out: -0.127,0.508 0.127,0.508 0.127,-0.508 -0.127,-0.508
  silkscreen extent 0,-0.51 0,0.51, body extent -0.83,-0.3 0.82,0.3, height 1.16
SMDR0402 [mm]
  rect 0.62x0.62 smd mask+0.076: 1(-0.45,0) 2(0.45,0)
  Top Layer pour cut-out: -0.102,0.381 0.076,0.381 0.076,-0.381 -0.102,-0.381
  silkscreen extent -0.38,-0.58 0.38,0.58, body extent -0.5,-0.25 0.5,0.25, height 0.35
SMDRC0402 [mm]
  rect 0.52x0.52 smd mask+0.076: 1(-0.4,0) 2(0.4,0)
  Top Layer pour cut-out: -0.102,0.254 0.076,0.254 0.076,-0.254 -0.102,-0.254
  silkscreen extent -0.25,-0.51 0.25,0.51, body extent -0.53,-0.25 0.47,0.25, height 0.35
SON40P220X220x80_HS-11N [mm] "SON, 10-Leads, Body 2.20x2.20mm, Pitch 0.40mm, Thermal Pad 1.70x0.83mm, IPC Medium Density"
  rect 0.8x0.2 smd mask+0.051: 1(-1.015,0.8)
  oval 0.8x0.2 smd mask+0.051: 2(-1.015,0.4) 3(-1.015,0) 4(-1.015,-0.4) 5(-1.015,-0.8) 6(1.015,-0.8) 7(1.015,-0.4) 8(1.015,0) 9(1.015,0.4) 10(1.015,0.8)
  rect 0.83x1.7 smd paste-1.7 mask+0.051: 11(0,0)
  silkscreen extent -1.59,-1.19 1.13,1.35, body extent -1.17,-1.12 1.18,1.13, height 0.8
SOT95P350X145-5N [mm] "STMPS2161STR,IC PWR SWITCH 1CH 1000MA SOT23-5"
  rect 0.6x1.2 smd mask+0.076: 1(-0.95,-1.15)
  oval 0.6x1.2 smd mask+0.076: 2(0,-1.15) 3(0.95,-1.15) 4(0.95,1.15) 5(-0.95,1.15)
  silkscreen extent -2.23,-1.22 1.5,0.86, body extent -1.5,-1.5 1.5,1.5, height 1.3
SWITCH_CLSB12A11T [mm] "SWITCH SLIDE SPDT 200MA 12V"
  round 0 hole 0.9 unplated paste+0 mask+0: 0(-3.4,0) 0(3.4,0)
  rect 1.2x1.6 smd paste+0 mask+0: 1(-2.5,-1.4) 2(0,1.4) 3(2.5,-1.4)
  silkscreen extent -4.25,-2.84 4.25,1.75, body extent -4.25,-2.08 4.25,2.08, height 5.6
TO-226-AA [mm]
  rect 1.5x1.5 hole 1: 1(-2.54,0)
  round 1.5 hole 1: 2(0,0) 3(2.54,0)
  silkscreen extent -2.6,-1.5 2.21,2.48, body extent -2.79,-1.59 2.79,2.61, height 8
TP_1.02X1.52MM_TH [mm]
  round 1.52 hole 1 mask+0.076: 1(0,0)
  silkscreen extent -1.02,-1.02 1.02,1.02
TP_40X40 [mil]
  round 40 smd paste-200 mask+3: 1(0,0)
USB_MICRO_B_10118194-0001LF [mm] "CONN USB MICRO B RECPT SMT R/A"
  rect 0.4x1.35 smd mask+0.076: 1(-1.3,1.35) 2(-0.65,1.35) 3(0,1.35) 4(0.65,1.35) 5(1.3,1.35)
  rect 1.5x1.55 smd mask+0.076: 6(-1,-1.35) 7(1,-1.35)
  oval 1.25x0.95 hole 0.55 slot 0.85 at 0 deg mask+0.076: 8(-2.5,1.35) 9(2.5,1.35)
  oval 1x1.55 hole 0.55 slot 1.15 at 90 deg mask+0.076: 10(-3.5,-1.35) 11(3.5,-1.35)
  Top Layer region: -3.5,-2.125 -2.3,-2.125 -2.3,-0.575 -3.5,-0.575
  Top Layer region: 3.5,-0.575 2.3,-0.575 2.3,-2.125 3.5,-2.125
  silkscreen extent -4.03,-2.87 4.02,2.59, body extent -4.04,-4.06 4.01,1.52, height 2.72
XTAL200X160X50-4N [mm]
  rect 0.95x0.85 smd: 1(-0.725,-0.575)
  oval 0.95x0.85 smd: 2(0.725,-0.575) 3(0.725,0.575) 4(-0.725,0.575)
  Top Layer pour cut-out: -0.127,0.8 0.127,0.8 0.127,-0.8 -0.127,-0.8
  silkscreen extent -1.78,-0.63 -1.52,-0.38, body extent -1.05,-0.85 1.05,0.85, height 0.56
XTAL325X155X80N [mm] "FC-135R 32.7680KA-AG3"
  rect 1.1x1.9 smd mask+0.076: 1(-1.25,0) 2(1.25,0)
  Top Layer pour cut-out: -0.632,0.934 -0.632,-0.96 0.633,-0.96 0.633,0.934
  silkscreen extent -0.46,-0.76 0.46,0.76, body extent -1.6,-0.75 1.6,0.75, height 0.8

## Part data
+3V3 GND GND LOD+ LOD- OUT: library part EMS-TP40X40-S, 1st Auxiliary Field=Black, Internal Part Number=EMS-TP40X40-S, Part Type="TEST POINT"
C1 C2: library part ECA0U33L10V0-SB, Manufacturer="Samsung Electro-Mechanics", Manufacturer Part Number=CL05A334KP5NNNC, Temp Co="-55°C ~ 85°C", Vendor Part Number=1276-6665-1-ND, 1st Auxiliary Field=10V, 2nd Auxiliary Field=±10%, 3rd Auxiliary Field="ROHS3 Compliant", Component Height (mm)=0.55mm, Internal Part Number=ECA0U33L10V0-SB, Part Type="CAP CER 0.33UF 10V X5R 0402", Vendor Name=Digi-Key
C3: library part ECA1N00K50V0-SB, Manufacturer=KEMET, Manufacturer Part Number=C0402C102J5RACTU, Temp Co="-55°C ~ 125°C", Vendor Part Number=399-7754-1-ND, 1st Auxiliary Field=50V, 2nd Auxiliary Field=±5%, 3rd Auxiliary Field="ROHS3 Compliant", Component Height (mm)=0.55mm, Internal Part Number=ECA1N00K50V0-SB, Part Type="CAP CER 1000PF 50V X7R 0402", Vendor Name=Digi-Key
C4 C5 C11 C12 C24 C25 C29 C35: library part ECA0U10K16V0-1-SB, Manufacturer="Samsung Electro-Mechanics America, Inc.", Manufacturer Part Number=CL05B104KO5NNNC, Temp Co=X7R, Vendor Part Number=1276-1001-1-ND, 1st Auxiliary Field=16V, 2nd Auxiliary Field=±10%, Internal Part Number=ECA0U10K16V0-1-SB, Part Type="CAP CER 0.1UF 16V X7R 0402", Vendor Name=Digi-Key
C6: library part ECA10N0K50V0-SB, Manufacturer="Samsung Electro-Mechanics America, Inc.", Manufacturer Part Number=C0402C103J5RACTU, Temp Co=X7R, Vendor Part Number=399-7758-1-ND, 1st Auxiliary Field=50V, 2nd Auxiliary Field=±5%, 4th Auxiliary Field="RoHS Compliant", Component Height (mm)=0.55, Internal Part Number=ECA10N0K50V0-SB, Part Type="CAP CER 10000PF 50V X7R 0402", Vendor Name=Digi-Key
C7: library part ECA1N50K50V0-SB, Manufacturer=Yageo, Manufacturer Part Number=CC0402JRX7R9BB152, Temp Co="-55°C ~ 125°C", Vendor Part Number=311-3763-1-ND, 1st Auxiliary Field=50V, 2nd Auxiliary Field=±5%, 3rd Auxiliary Field="ROHS3 Compliant", Component Height (mm)=0.55mm, Internal Part Number=ECA1N50K50V0-SB, Part Type="CAP CER 1500PF 50V X7R 0402", Vendor Name=Digi-Key
C8 C18: library part ECA100P0K25V0-SB, "CAP CER 100PF 25V C0G/NP0 0402", Manufacturer=KEMET, Manufacturer Part Number=DNP, Temp Co="-55°C ~ 125°C", Vendor Part Number=399-1022-1-ND, 1st Auxiliary Field=25V, 2nd Auxiliary Field=±5%, 3rd Auxiliary Field="ROHS3 Compliant", Component Height (mm)=0.55mm, Internal Part Number=ECA100P0K25V0-SB, Part Type="CAP CER 100PF 25V C0G/NP0 0402", Vendor Name=Digi-Key
C9 C10 C30 C31: library part ECA1U00L16V0-SB, Manufacturer="Samsung Electro-Mechanics", Manufacturer Part Number=CL05A105KO5NNNC, Temp Co=X5R, Vendor Part Number=1276-1067-1-ND, 1st Auxiliary Field=16V, 2nd Auxiliary Field=±10%, 3rd Auxiliary Field="RoHS Compliant", Component Height (mm)=0.55MM, Internal Part Number=ECA1U00L16V0-SB, Part Type="CAP CER 1UF 16V X5R 0402", Vendor Name=Digi-Key
C13 C14 C15 C17: library part ECA12P0K50V0-SB, Manufacturer=KEMET, Manufacturer Part Number=CBR04C120J5GAC, Temp Co="-55°C ~ 125°C", Vendor Part Number=399-6169-1-ND, 1st Auxiliary Field=50V, 2nd Auxiliary Field=±5%, 3rd Auxiliary Field="RoHS Compliant", Component Height (mm)=0.55mm, Internal Part Number=ECA12P0K50V0-SB, Part Type="CAP CER 12PF 50V C0G/NP0 0402", Vendor Name=Digi-Key
C16: library part ECA100P0K25V0-SB, "CAP CER 100PF 25V C0G/NP0 0402", Manufacturer=KEMET, Manufacturer Part Number=C0402C101J3GACTU, Temp Co="-55°C ~ 125°C", Vendor Part Number=399-1022-1-ND, 1st Auxiliary Field=25V, 2nd Auxiliary Field=±5%, 3rd Auxiliary Field="ROHS3 Compliant", Component Height (mm)=0.55mm, Internal Part Number=ECA100P0K25V0-SB, Part Type="CAP CER 100PF 25V C0G/NP0 0402", Vendor Name=Digi-Key
C19 C20: library part ECA1P00V50V0-SB, Manufacturer="Samsung Electro-Mechanics", Manufacturer Part Number=CL05C010CB5NNNC, Temp Co="-55°C ~ 125°C", Vendor Part Number=1276-1595-1-ND, 1st Auxiliary Field=50V, 2nd Auxiliary Field=±0.25pF, 3rd Auxiliary Field="RoHS Compliant", Component Height (mm)=0.55mm, Internal Part Number=ECA1P00V50V0-SB, Part Type="CAP CER 1PF 50V C0G/NP0 0402", Vendor Name=Digi-Key
C21: library part ECA820PK50V0-SB, Manufacturer="Samsung Electro-Mechanics", Manufacturer Part Number=CL05C821JB5NNNC, Temp Co="-55°C ~ 125°C", Vendor Part Number=1276-1727-1-ND, 1st Auxiliary Field=50V, 2nd Auxiliary Field=±5%, 3rd Auxiliary Field="ROHS3 Compliant", Component Height (mm)=0.55mm, Internal Part Number=ECA820PK50V0-SB, Part Type="CAP CER 820PF 50V C0G/NP0 0402", Vendor Name=Digi-Key
C22 C23 C26: library part ECA4U70N6V30-SB, Manufacturer="Murata Electronics North America", Manufacturer Part Number=GRM155R60J475ME47D, Temp Co="-55°C ~ 85°C", Vendor Part Number=490-5915-1-ND, 1st Auxiliary Field=6.3V, 2nd Auxiliary Field=±20%, 3rd Auxiliary Field="RoHS Compliant", Component Height (mm)=0.60mm, Internal Part Number=ECA4U70N6V30-SB, Part Type="CAP CER 4.7UF 6.3V X5R 0402", Vendor Name=Digi-Key
C27 C28: library part ECA10U0M10V0-SB, Manufacturer="Samsung Electro-Mechanics America, Inc.", Manufacturer Part Number=CL05A106MP5NUNC, Temp Co=X5R, Vendor Part Number=1276-1450-1-ND, 1st Auxiliary Field=10V, 2nd Auxiliary Field=±20%, Component Height (mm)=0.70mm, Internal Part Number=ECA10U0M10V0-SB, Part Type="CAP CER 10UF 10V X5R 0402", Vendor Name=DigiKey
C32: library part ECA1P50D50V0-SB, Manufacturer="Murata Electronics North America", Manufacturer Part Number=GJM1555C1H1R5BB01D, Temp Co="C0G, NP0", Vendor Part Number=490-8087-1-ND, 1st Auxiliary Field=50V, 2nd Auxiliary Field=±0.1pF, Internal Part Number=ECA1P50D50V0-SB, Part Type="CAP CER 1.5PF 50V NP0 0402", Vendor Name=Digi-Key
C34: library part ECA2U20L10V-SB, Manufacturer="TDK Corporation", Manufacturer Part Number=C1005JB1A225K050BC, Temperature Coefficient="-25°C ~ 85°C", Vendor Part Number=445-10904-1-ND, 1st Auxiliary Field=2.2µF, 2nd Auxiliary Field=±10%, 3rd Auxiliary Field="RoHS Compliant", 4th Auxiliary Field=10V, Component Height (mm)=0.55mm, Internal Part Number=ECA2U20L10V-SB, Part Type="CAP CER 2.2UF 10V JB 0402", Vendor Name=Digi-Key
D1: library part ELDGR2V0020M0-S, Manufacturer="Bivar Inc.", Manufacturer Part Number=SM1204BC, Vendor Part Number=492-1228-1-ND, 1st Auxiliary Field="2V Green, 2V Red", 2nd Auxiliary Field="20mA Green, 20mA Red", 3rd Auxiliary Field="RoHS Compliant", Component Height (mm)=1.00mm, Internal Part Number=ELDGR2V0020M0-S, Part Type="LED GREEN/RED CLEAR 1204 SMD R/A", Vendor Name=Digi-Key
D3: library part ELDB2V652M00-SC, Manufacturer=Kingbright, Manufacturer Part Number=APT1608LVBC/D, Vendor Part Number=754-1933-1-ND, 1st Auxiliary Field=2.65V, 2nd Auxiliary Field=2mA, 3rd Auxiliary Field="RoHS Compliant", Component Height (mm)=0.75mm, Internal Part Number=ELDB2V652M00-SC, Part Type="LED BLUE CLEAR 2SMD", Vendor Name=Digi-Key
D4: library part ELDG2V0020M0-SC, Manufacturer="Lite-On Inc.", Manufacturer Part Number=LTST-C191KGKT, Vendor Part Number=160-1446-1-ND, 1st Auxiliary Field=2V, 2nd Auxiliary Field=20mA, 3rd Auxiliary Field="RoHS Compliant", Component Height (mm)=0.55mm, Internal Part Number=ELDG2V0020M0-SC, Part Type="LED GREEN CLEAR SMD", Vendor Name=Digi-Key
FID1 FID2 FID3 FID4: library part FID_40X40
J1: library part "EMS-8.06.16 J-LINK 6-PIN NEEDLE ADAPTER", Manufacturer="Segger Microcontroller Systems", Manufacturer Part Number="8.06.16 J-LINK 6-PIN NEEDLE ADAPTER", Vendor Part Number=899-1051-ND, 1st Auxiliary Field=J-Link, 3rd Auxiliary Field="RoHS Compliant", Internal Part Number="EMS-8.06.16 J-LINK 6-PIN NEEDLE ADAPTER", Part Type="J-LINK 6-PIN NEEDLE ADAPTER", Vendor Name=Digi-Key
J2: library part ECNJSTHE02-T, Manufacturer="JST Sales America Inc.", Manufacturer Part Number=S2B-PH-K-S(LF)(SN), Vendor Part Number=455-1719-ND, 1st Auxiliary Field="2 Pos", 2nd Auxiliary Field=2mm, Component Height (mm)=4.8mm, Internal Part Number=ECNJSTHE02-T, Part Type="CONN HOUSING PH 2POS 2MM WHITE", Vendor Name=Digi-Key
J3: library part EINUSBBR06-S-1364, Manufacturer="Amphenol FCI", Manufacturer Part Number=10118194-0001LF, Temp Co="-30°C ~ 80°C", Vendor Part Number=609-4618-1-ND, 1st Auxiliary Field="USB - micro B", 2nd Auxiliary Field="5 POS", 3rd Auxiliary Field="RoHS Compliant", Component Height (mm)=3mm, Internal Part Number=EINUSBBR06-S-1364, Part Type="CONN USB MICRO B RECPT SMT R/A", Vendor Name=Digi-Key
L1: library part EIN3N90T170M-SB, Manufacturer="Murata Electronics North America", Manufacturer Part Number=LQP15MN3N9B02D, Temp Co="-40°C ~ 85°C", Vendor Part Number=490-1131-1-ND, 1st Auxiliary Field=170mA, 2nd Auxiliary Field="500 mOhm Max", 3rd Auxiliary Field="RoHS Compliant", Component Height (mm)=0.45mm, Internal Part Number=EIN3N90T170M-SB, Part Type="FIXED IND 3.9NH 170MA 500 MOHM", Vendor Name=Digi-Key
LA RA RL: library part EMS-TP_1X1.52MM_TH, Internal Part Number=EMS-TP_1X1.52MM_TH, Part Type="Test Point- 1.02mm Hole, 1.52mm Round Pad"
MH1 MH2: library part EMS-MH2.2MM, Internal Part Number=EMS-MH2.2MM
R1: library part ERE1M40G116-SB, Manufacturer="Stackpole Electronics Inc", Manufacturer Part Number=RMCF0402FT1M40, Temp Co="-55°C ~ 155°C", Vendor Part Number=RMCF0402FT1M40CT-ND, 1st Auxiliary Field="0.063W, 1/16W", 2nd Auxiliary Field=±1%, 3rd Auxiliary Field="ROHS3 Compliant", Component Height (mm)=0.40mm, Internal Part Number=ERE1M40G116-SB, Part Type="RES 1.4M OHM 1% 1/16W 0402", Vendor Name=Digi-Key
R2 R3 R4 R5 R9 R11: library part ERE10M0K110-SB, Manufacturer="Panasonic Electronic Components", Manufacturer Part Number=ERJ-2GEJ106X, Temp Co="-55°C ~ 155°C", Vendor Part Number=P10MJCT-ND, 1st Auxiliary Field=0.1W, 2nd Auxiliary Field=±5%, 3rd Auxiliary Field="ROHS3 Compliant", Component Height (mm)=0.4mm, Internal Part Number=ERE10M0K110-SB, Part Type="RES SMD 10M OHM 5% 1/10W 0402", Vendor Name=Digi-Key
R6 R8 R12 R14 R17 R21 R35 R36 R37 R38: library part ERE0R00110-SB, Manufacturer="Panasonic Electronic Components", Manufacturer Part Number=ERJ-2GE0R00X, Vendor Part Number=P0.0JCT-ND, 1st Auxiliary Field=0.1W, 2nd Auxiliary Field=Jumper, Component Height (mm)=0.40mm, Internal Part Number=ERE0R00110-SB, Part Type="RES SMD 0.0OHM JUMPER 1/10W 0402", Vendor Name=Digi-Key
R7 R10: library part ERE180KG116-SB, Manufacturer=Yageo, Manufacturer Part Number=RC0402FR-07180KL, Temp Co="-55°C ~ 155°C", Vendor Part Number=311-180KLRCT-ND, 1st Auxiliary Field="0.063W, 1/16W", 2nd Auxiliary Field=±1%, 3rd Auxiliary Field="ROHS3 Compliant", Component Height (mm)=0.40mm, Internal Part Number=ERE180KG116-SB, Part Type="RES SMD 180K OHM 1% 1/16W 0402", Vendor Name=Digi-Key
R13: library part ERE360KG110-SB, Manufacturer="Panasonic Electronic Components", Manufacturer Part Number=ERJ-2RKF3603X, Temp Co="-55°C ~ 155°C", Vendor Part Number=P360KLCT-ND, 1st Auxiliary Field="0.1W, 1/10W", 2nd Auxiliary Field=±1%, 3rd Auxiliary Field="ROHS3 Compliant", Component Height (mm)=0.40mm, Internal Part Number=ERE360KG110-SB, Part Type="RES SMD 360K OHM 1% 1/10W 0402", Vendor Name=Digi-Key
R15 R16 R20: library part ERE1M00G110-SB, Manufacturer="Panasonic Electronic Components", Manufacturer Part Number=ERJ-2RKF1004X, Temp Co="-55°C ~ 155°C", Vendor Part Number=P1.00MLCT-ND, 1st Auxiliary Field=0.1W, 2nd Auxiliary Field=±1%, Component Height (mm)=0.40mm, Internal Part Number=ERE1M00G110-SB, Part Type="RES SMD 1M OHM 1% 1/10W 0402", Vendor Name=Digi-Key
R18 R23 R30: library part ERE100KG110-SB, Manufacturer="Panasonic Electronic Components", Manufacturer Part Number=ERJ-2RKF1003X, Temp Co=±100ppm/°C, Vendor Part Number=P100KLCT-ND, 1st Auxiliary Field=0.1W, 2nd Auxiliary Field=±1%, Component Height (mm)=0.40mm, Internal Part Number=ERE100KG110-SB, Part Type="RES SMD 100K OHM 1% 1/10W 0402", Vendor Name=Digi-Key
R19 R24 R27: library part ERE10K0G110-SB, Manufacturer="Panasonic Electronic Components", Manufacturer Part Number=ERJ-2RKF1002X, Temp Co=±100ppm/°C, Vendor Part Number=P10.0KLCT-ND, 1st Auxiliary Field=0.1W, 2nd Auxiliary Field=±1%, Component Height (mm)=0.40mm, Internal Part Number=ERE10K0G110-SB, Part Type="RES SMD 10K OHM 1% 1/10W 0402", Vendor Name=Digi-Key
R22: library part ERE4K70J110-SB, Manufacturer="Panasonic Electronic Components", Manufacturer Part Number=ERJ-2GEJ472X, Temp Co=±200ppm/°C, Vendor Part Number=P4.7KJCT-ND, 1st Auxiliary Field=0.1W, 2nd Auxiliary Field=±5%, Component Height (mm)=0.40mm, Internal Part Number=ERE4K70J110-SB, Part Type="RES SMD 4.7K OHM 5% 1/10W 0402", Vendor Name=Digi-Key
R25 R26: library part ERE1K50G110-SB, Manufacturer="Panasonic Electronic Components", Manufacturer Part Number=ERJ-2RKF1501X, Temp Co=±100ppm/°C, Vendor Part Number=P1.50KLCT-ND, 1st Auxiliary Field=0.1W, 2nd Auxiliary Field=±1%, Component Height (mm)=0.40mm, Internal Part Number=ERE1K50G110-SB, Part Type="RES SMD 1.5K OHM 1% 1/10W 0402", Vendor Name=Digi-Key
R28: library part ERE16K5G110-SB, Manufacturer="Panasonic Electronic Components", Manufacturer Part Number=ERJ-2RKF1652X, Temp Co=±100ppm/°C, Vendor Part Number=P16.5KLCT-ND, 1st Auxiliary Field=0.1W, 2nd Auxiliary Field=±1%, Component Height (mm)=0.40mm, Internal Part Number=ERE16K5G110-SB, Part Type="RES SMD 16.5K OHM 1% 1/10W 0402", Vendor Name=Digi-Key
R29: library part ERE13K3G110-SB, Manufacturer="Panasonic Electronic Components", Manufacturer Part Number=ERJ-2RKF1332X, Temp Co=±100ppm/°C, Vendor Part Number=P13.3KLCT-ND, 1st Auxiliary Field=0.1W, 2nd Auxiliary Field=±1%, Component Height (mm)=0.40mm, Internal Part Number=ERE13K3G110-SB, Part Type="RES SMD 13.3K OHM 1% 1/10W 0402", Vendor Name=Digi-Key
R31: library part ERE470RG110-SB, Manufacturer="Panasonic Electronic Components", Manufacturer Part Number=ERJ-2RKF4700X, Temp Co=±100ppm/°C, Vendor Part Number=P470LCT-ND, 1st Auxiliary Field=±1%, 2nd Auxiliary Field=1/10W, Component Height (mm)=0.40mm, Internal Part Number=ERE470RG110-SB, Part Type="RES SMD 470 OHM 1% 1/10W 0402", Vendor Name=Digi-Key
R32: library part ERE1K00G110-SB_1, Internal Part Number=ERE1K00G110-SB, Manufacturer="Panasonic Electronic Components", Manufacturer Part Number=ERJ-2RKF1001X, Temp Co=±100ppm/°C, Vendor Part Number=P1.00KLCT-ND, 1st Auxiliary Field="0.1W, 1/10W", 2nd Auxiliary Field=±1%, 3rd Auxiliary Field="RoHS Compliant", Component Height (mm)=0.40mm, Part Type="RES SMD 1K OHM 1% 1/10W 0402", Vendor Name=Digi-Key
R33: library part ERE45K3F116-SB, Manufacturer="Stackpole Electronics Inc", Manufacturer Part Number=RNCF0402DTE45K3, Temp Co="-55°C ~ 155°C", Vendor Part Number=RNCF0402DTE45K3CT-ND, 1st Auxiliary Field="0.063W, 1/16W", 2nd Auxiliary Field=±0.5%, 3rd Auxiliary Field="ROHS3 Compliant", Component Height (mm)=0.35mm, Internal Part Number=ERE45K3F116-SB, Part Type="RES 45.3K OHM 0.5% 1/16W 0402", Vendor Name=Digi-Key
R34: library part ERE10K0F116-SB, Manufacturer="Panasonic Electronic Components", Manufacturer Part Number=ERJ-2RHD1002X, Temp Co="-55°C ~ 125°C", Vendor Part Number=P15984CT-ND, 1st Auxiliary Field="0.063W, 1/16W", 2nd Auxiliary Field=±0.5%, 3rd Auxiliary Field="ROHS3 Compliant", Component Height (mm)=0.40mm, Internal Part Number=ERE10K0F116-SB, Part Type="RES SMD 10K OHM 0.5% 1/16W 0402", Vendor Name=Digi-Key
R39: library part ERE0R00110-SB, Manufacturer="Panasonic Electronic Components", Manufacturer Part Number=DNP, Vendor Part Number=P0.0JCT-ND, 1st Auxiliary Field=0.1W, 2nd Auxiliary Field=Jumper, Component Height (mm)=0.40mm, Internal Part Number=ERE0R00110-SB, Part Type="RES SMD 0.0OHM JUMPER 1/10W 0402", Vendor Name=Digi-Key
SB1 SB2 SB3: "*", Internal Part Number=EMS_SB0805
SW1: library part EMS-CL-SB-12A-11T, Manufacturer="Nidec Copal Electronics", Manufacturer Part Number=CL-SB-12A-11T, Temp Co="-40°C ~ 85°C", Vendor Part Number=563-1316-1-ND, 1st Auxiliary Field="200mA (DC)", 2nd Auxiliary Field=SPDT, 3rd Auxiliary Field="ROHS3 Compliant", Component Height (mm)=3.5mm, Internal Part Number=EMS-CL-SB-12A-11T, Part Type="SWITCH SLIDE SPDT 200MA 12V", Vendor Name=Digi-Key
TP1 TP2 TP3: library part EMS-ELE_6X8MM_TH, Internal Part Number=EMS-ELE_6X8MM_TH, Part Type="Electrode point"
U1: library part EICADLFCSP-20-1862, Manufacturer="Analog Devices", Manufacturer Part Number=AD8232ACPZ-R7, Temp Co="-40°C ~ 85°C", Vendor Part Number=584-AD8232ACPZ-R7, 1st Auxiliary Field="2 V to 3.5 V", 2nd Auxiliary Field="170 uA", 3rd Auxiliary Field="RoHS Compliant", Component Height (mm)=0.8mm, Internal Part Number=EICADLFCSP-20-1862, Part Type="Analog Front End - AFE ECG and HRM IC Single Lead", Vendor Name=Mouser
U2: library part EICNSVFQFN-73-1863, Manufacturer="Nordic Semiconductor ASA", Manufacturer Part Number=NRF52840-QIAA-R, Temp Co="-40°C ~ 85°C", Vendor Part Number=1490-1071-1-ND, 1st Auxiliary Field=2.4GHz, 2nd Auxiliary Field="1.7V ~ 5.5V", 3rd Auxiliary Field="ROHS3 Compliant", 4th Auxiliary Field=2Mbps, Component Height (mm)=0.85mm, Internal Part Number=EICNSVFQFN-73-1863, Part Type="IC RF TXRX+MCU 802.15.4 73VFQFN", Vendor Name=Digi-Key
U3: library part EICSSTDFN-10-1864, Manufacturer="Skyworks Solutions Inc.", Manufacturer Part Number=AAT3693IDH-AA-T1, Temp Co="-40°C ~ 85°C (TA)", Vendor Part Number=863-1512-1-ND, 1st Auxiliary Field=7.5V, 2nd Auxiliary Field=1.6A, 3rd Auxiliary Field="ROHS3 Compliant", Component Height (mm)=0.8mm, Internal Part Number=EICSSTDFN-10-1864, Part Type="1.6A LINEAR LI-ION CHGR 10TDFN", Vendor Name=Digi-Key
U4: library part EICMTSOT23-5-****, Manufacturer="Microchip Technology", Manufacturer Part Number=MCP1711T-33I/OT, Temp Coefficient="-40°C ~ 85°C", Vendor Part Number=MCP1711T-33I/OTCT-ND, 1st Auxiliary Field=6V, 2nd Auxiliary Field=150mA, 3rd Auxiliary Field="RoHS Compliant", 4th Auxiliary Field=3.3V, Component Height (mm)=1.45mm, Internal Part Number=EICMTSOT23-5-****, Part Type="IC REG LINEAR 3.3V 150MA SOT23-5", Vendor=Digi-Key
U5: library part EICADTO92-3-1865, Manufacturer="Analog Devices Inc.", Manufacturer Part Number=TMP36GT9Z, Temp Co="25°C (-40°C ~ 125°C)", Vendor Part Number=TMP36GT9Z-ND, 1st Auxiliary Field="2.7V ~ 5.5V", 2nd Auxiliary Field=10mV/°C, 3rd Auxiliary Field="RoHS Compliant", Component Height (mm)=18.03mm, Internal Part Number=EICADTO92-3-1865, Part Type="SENSOR ANALOG -40C-125C TO92-3", Vendor Name=Digi-Key
X1: library part EMS-ECS-320-8-37CKM, Manufacturer="ECS Inc.", Manufacturer Part Number=ECS-320-8-37CKM, Temp Co="-20°C ~ 70°C", Vendor Part Number=XC1547CT-ND, 1st Auxiliary Field=32MHz, 2nd Auxiliary Field=8pF, 3rd Auxiliary Field="RoHS Compliant", Component Height (mm)=0.55mm, Internal Part Number=EMS-ECS-320-8-37CKM, Part Type="CRYSTAL 32.0000MHZ 8PF SMD", Vendor Name=Digi-Key
Y1: library part EMS-ABS07-32.768KHZ-T, Manufacturer="Abracon LLC", Manufacturer Part Number=ABS07-32.768KHZ-T, Temp Co="-40°C ~ 85°C", Vendor Part Number=535-9542-1-ND, 1st Auxiliary Field=32.768kHz, 2nd Auxiliary Field=±20ppm, 3rd Auxiliary Field="RoHS Compliant", Component Height (mm)=0.9mm, Internal Part Number=EMS-ABS07-32.768KHZ-T, Part Type="CRYSTAL 32.7680KHZ 12.5PF SMD", Vendor Name=Digi-Key

## Via types
v1: diameter 0.61, hole 0.3, Top Layer to Bottom Layer, tented both sides, 132 vias
v2: diameter 0.5, hole 0.25, Top Layer to Bottom Layer, tented both sides, 20 vias
v3: diameter 0.508, hole 0.25, Top Layer to Bottom Layer, tented both sides, 17 vias
v4: diameter 0.457, hole 0.25, Top Layer to Bottom Layer, tented both sides, 1 vias
v5: diameter 0.61, hole 0.305, Top Layer to Bottom Layer, tented both sides, 1 vias

## Nets (pads, with @x,y where several pads share a name; then routed paths per layer and width w, separated by ;. In a path a pad name is that pad's centre, name@x,y a point inside that pad or via, vN(x,y) a via of type N, cw(c..) or ccw(c..) an arc to the next point about the centre after c; other vN are vias at no path point)
+3V3: +3V3.1 C31.2 SB2.1 SB3.1 U4.5 | length 12.4
  Top Layer w0.254: U4.5@-12.421,-2.337 -12.479,-2.279 C31.2@-12.479,-0.838 v1(-11.455,-0.838) ; v1(-10.312,0.61) -10.287,0.635 +3V3.1@-10.287,1.676
  Top Layer w0.508: v1(-14.416,0.316) SB2.1@-14.416,1.626 ; v1(-14.416,2.935) SB2.1@-14.416,1.626 ; v1(-13.106,1.626) SB2.1@-14.416,1.626 ; v1(-9.45,-0.627) SB3.1@-8.14,-0.627 ; v1(-8.14,-2.405) SB3.1@-8.14,-0.627 ; v1(-8.14,1.151) SB3.1@-8.14,-0.627
  other v1: -12.04,0.102
ANT: C32.2 R38.2 | length 31.6
  Top Layer w0.254: R38.2@16.321,2.217 C32.2@17.7,2.217 17.707,2.21 23.01,2.21 23.01,-0.008 20.066,-0.008 20.066,-2.065 23.01,-2.065 23.01,-4.047 20.041,-4.047 20.041,-6.002 23.01,-6.002 23.01,-7.882 20.045,-7.882
DEC1: C12.2 U2.C1 | length 3.5
  Top Layer w0.152: C12.2@0,5.925 0,5.512 0.787,4.724 1.168,4.724 1.57,4.323 1.57,3.926 U2.C1@2.027,3.469
DEC3: C16.1 U2.D23 | length 5.1
  Top Layer w0.152: U2.D23@8.027,3.219 8.083,3.219 8.083,3.243 8.472,3.632 9.175,3.632 9.413,3.871
  Top Layer w0.229: 9.413,3.871 10.318,4.775 11.465,4.775 C16.1@12.178,5.488
DEC4_6: C9.2 C18.1 U2.B5 U2.E24 | length 16.1
  Top Layer w0.152: U2.E24@8.527,2.969 8.682,3.124 9.461,3.124 10.452,4.115
  Top Layer w0.229: U2.B5@3.281,3.969 3.281,4.624 3.661,5.004 v3(3.661,5.994) C9.2@3.661,6.967 ; 10.452,4.115 v3(11.176,4.115) v3(11.176,4.115) C18.1@12.178,4.116
  Bottom Layer w0.229: v3(3.661,5.994) 4.613,5.042 5.928,5.042 6.548,5.662 7.274,5.662 8.821,4.115 v3(11.176,4.115)
GND: C4.1 C5.1 C8.2 C9.1 C10.1 C11.1 C12.1 C13.1 C14.1 C15.1 C16.2 C17.1 C18.2 C19.1 C20.1 C21.1 C22.1 C23.1 C24.1 C25.1 C26.1 C27.2 C28.2 C29.1 C30.1 C31.1 C32.1 C34.1 C35.1 GND.1 J1.5 J2.2 J3.5 J3.6 J3.7 J3.8 J3.9 J3.10 J3.11 R11.1 R17.2 R27.2 R28.1 R29.2 R32.2 R34.1 U1.16 U1.21 U2.74 U2.AD2 U2.B7 U2.F23 U3.5 U3.11 U4.2 U5.3 X1.2 X1.4 | length 70.5
  Top Layer w0.145: U2.F23@8.027,2.719 8.128,2.618 8.638,2.618 8.741,2.721 9.628,2.721 10.024,3.118 C19.1@10.596,3.118
  Top Layer w0.229: U2.B7@3.777,3.969 3.777,2.719 v2(4.677,1.819) U2.74@5.277,1.219
  Top Layer w0.254: J3.10@-19.228,-12.1 -19.228,-12.469 J3.6@-17.655,-14.042 ; J3.7@-16.396,-15.597 -14.823,-17.17 J3.11@-14.823,-17.54 ; v1(-14.834,9.373) -14.834,10.175 R11.1@-14.821,10.188 ; v1(-14.605,12.751) -13.723,12.751 C4.1@-13.716,12.744 ; v1(-14.387,-0.838) C31.1@-13.379,-0.838 ; J3.5@-14.109,-14.131 -13.265,-14.975 J3.9@-13.354,-15.063 ; v1(-12.852,14.953) C5.1@-12.09,14.191 ; C5.1@-11.913,14.191 -11.165,14.191 -10.715,13.741 U1.16@-10.715,12.87 ; C30.1@-11.488,-6.352 v1@-10.594,-6.352 ; C30.1@-11.471,-6.308 U4.2@-11.471,-4.637 ; C27.2@-10.991,-12.395 -10.973,-12.377 v1(-10.973,-11.633) ; v3(-9.906,-11.405) v5(-8.204,-11.405) ; C28.2@-9.906,-8.846 v1(-9.906,-7.899) ; R17.2@-9.677,16.96 v1(-9.677,17.805) ; R27.2@-8.941,-5.798 v1(-8.941,-4.902) ; v1(-8.179,19.888) -8.172,19.888 R32.2@-7.435,19.152 ; GND.1@-7.772,-3.988 -7.696,-3.912 v1(-6.375,-3.912) ; U3.5@-7.347,-12.42 v1(-6.432,-12.42) ; C29.1@-6.325,-11.093 v1(-5.352,-11.093) ; R28.1@-5.773,-9.068 v1(-4.801,-9.068) ; R29.2@-5.773,-7.658 v1(-4.801,-7.658) ; v1(-4.394,2.489) -3.38,2.489 C17.1@-3.378,2.487 ; -4.343,0.305 -0.577,0.305 1.118,2 v1(1.118,2.134) ; C15.1@-3.353,4.951 v1(-3.353,5.67) ; v1(-1.8,-2.591) C22.1@-1.8,-1.687 ; v1(-1.778,6.045) -1.778,5.893 -1.321,5.436 -0.719,5.436 0.61,4.107 v1(0.61,4.089) ; v1(-0.737,7.518) -0.044,6.825 C12.1@0,6.825 ; v1(0.79,-3.962) 0.79,-2.863 C23.1@0.791,-2.862 ; C10.1@2.007,6.571 v1(2.007,7.417) ; v1(2.518,-2.896) 2.518,-2.04 U2.AD2@2.527,-2.031 ; C9.1@3.661,7.867 v1(3.661,8.712) ; U2.74@5.277,1.219 v2(5.877,1.819) 6.777,2.719 U2.F23@8.027,2.719 ; v1(5.515,-4.826) 5.515,-3.955 C25.1@5.516,-3.954 ; C8.2@5.693,7.59 v1(5.693,8.407) ; C11.1@7.163,7.054 v1(7.163,7.874) ; C24.1@8.025,-3.979 8.029,-3.983 v1(8.029,-4.826) ; v1(8.382,9.398) 8.382,8.553 C14.1@8.407,8.527 8.908,8.527 9.135,8.754 X1.2@9.968,8.754 ; C26.1@10.716,-2.615 C26.1@10.716,-2.615 v1(11.535,-2.616) ; C21.1@10.991,0.102 11.938,0.102 v1(11.963,0.076) ; X1.4@11.418,7.604 12.981,7.604 C13.1@13.259,7.881 v1(14.053,7.881) ; C18.2@12.976,4.065 13.051,4.14 13,4.14 C18.2@12.976,4.116 ; C16.2@12.976,5.411 12.977,5.41 13.029,5.462 C16.2@12.976,5.462 ; C16.2@13.131,5.488 13.234,5.385 v1(14.072,5.385) ; C18.2@13.153,4.14 13.818,4.14 v1(13.919,4.14) ; C20.1@14.227,3.117 C20.1@14.263,3.081 ; v1(14.859,3.677) C20.1@14.263,3.081 ; J1.5@15.36,-14.173 v1(16.047,-14.861) ; v1(15.646,-8.001) GND.1@15.646,-6.909 ; C32.1@17.7,3.117 v1(17.7,4.038) ; C20.1@14.263,3.081 14.3,3.044 14.226,3.044 C20.1@14.263,3.081
  Bottom Layer w0.254: v1(-0.813,17.221) -0.813,18.039 R34.1@-0.793,18.059
  other v1: 10.312,-21.158 15.062,-18.466 17.17,-16.231 17.323,-12.366 17.323,-10.507 5.385,-10.414 7.772,-9.931 12.598,-9.296 17.297,-8.839 2.794,-8.204 0.305,-8.153 17.297,-6.981 12.624,-6.833 -10.574,-6.371 -2.007,-6.325 17.297,-5.122 12.675,-4.674 17.323,-3.031 15.268,-1.245 17.323,-1.173 17.323,0.686 14.042,0.711 15.9,0.711 10.998,5.74 17.653,6.375 9.017,6.579 17.653,8.234 17.653,10.092 -11.836,20.015 8.179,20.625 -9.373,21.107 -7.828,21.793 4.293,22.53 -5.512,22.631
  other v2: 3.377,-0.581 4.677,-0.581 5.877,-0.581 7.077,-0.581 3.377,0.619 4.677,0.619 5.877,0.619 7.077,0.619 3.377,1.819 7.077,1.819 3.377,3.019 4.677,3.019 5.877,3.019 7.077,3.019 -9.415,11.312 -8.315,11.312 -9.415,12.412 -8.315,12.412
LA: LA.1 R6.1 R14.1 TP1.1 | length 40.2
  Top Layer w0.145: R6.1@-10.897,4.528 -10.897,3.912 -10.113,3.128 -7.979,3.128 R14.1@-6.553,4.554 v1(-5.646,4.554)
  Bottom Layer w0.145: v1(-5.646,4.554) -5.161,5.038 1.954,5.038 3.157,3.835 7.395,3.835 7.696,3.534 11.488,3.534 12.294,4.34 12.294,5.436 13.335,6.477 13.335,10.16 LA.1@14.275,11.1 14.275,11.275 TP1.1@18.9,15.9
LED_nRF_AD: R31.1 U2.AD8 | length 1.7
  Top Layer w0.152: R31.1@3.556,-3.538 3.556,-3.011 4.027,-2.54 U2.AD8@4.027,-2.031
LOD+: LOD+.1 U1.12 U2.A20 | length 24.8
  Top Layer w0.152: U1.12@-8.365,13.712 -8.365,14.318 LOD+.1@-5.969,16.713 v3(-4.826,16.713) ; U2.A20@7.027,4.469 v3(7.027,5.029)
  Bottom Layer w0.152: v3(-4.826,16.713) 1.168,10.719 1.168,7.188 3.781,4.576 6.357,4.576 6.81,5.029 v3(7.027,5.029)
LOD-: LOD-.1 U1.11 U2.B19 | length 23.9